# EAGLE board SparkFun_I2S_Audio_Breakout-Panel (EAGLE 9.1.0), part 1 of 6
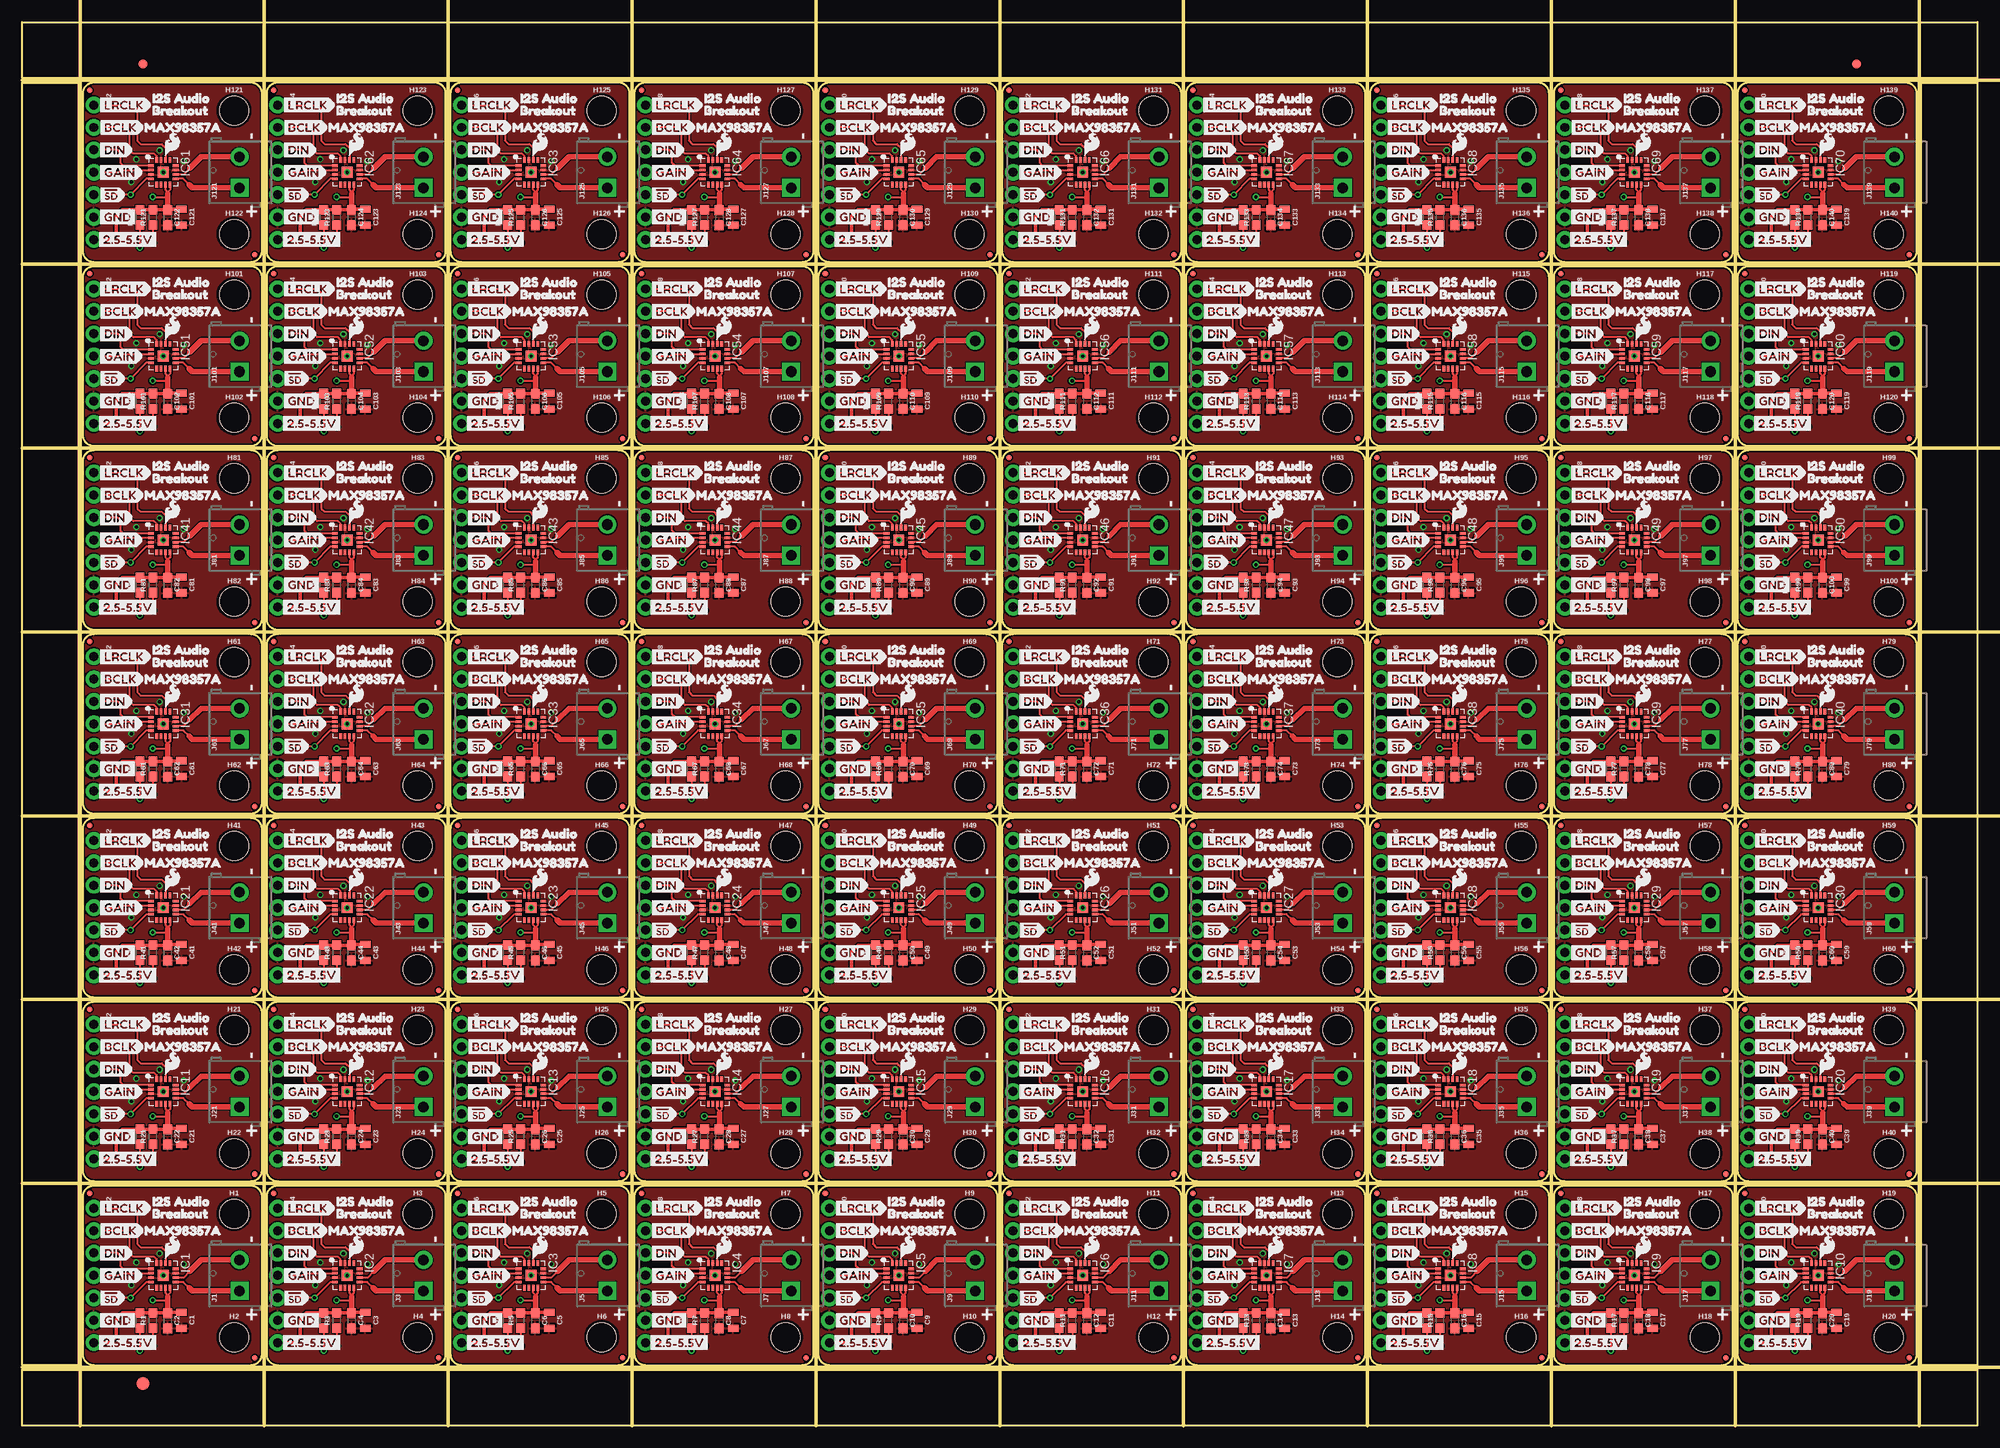
[diagram p0: board, top side]
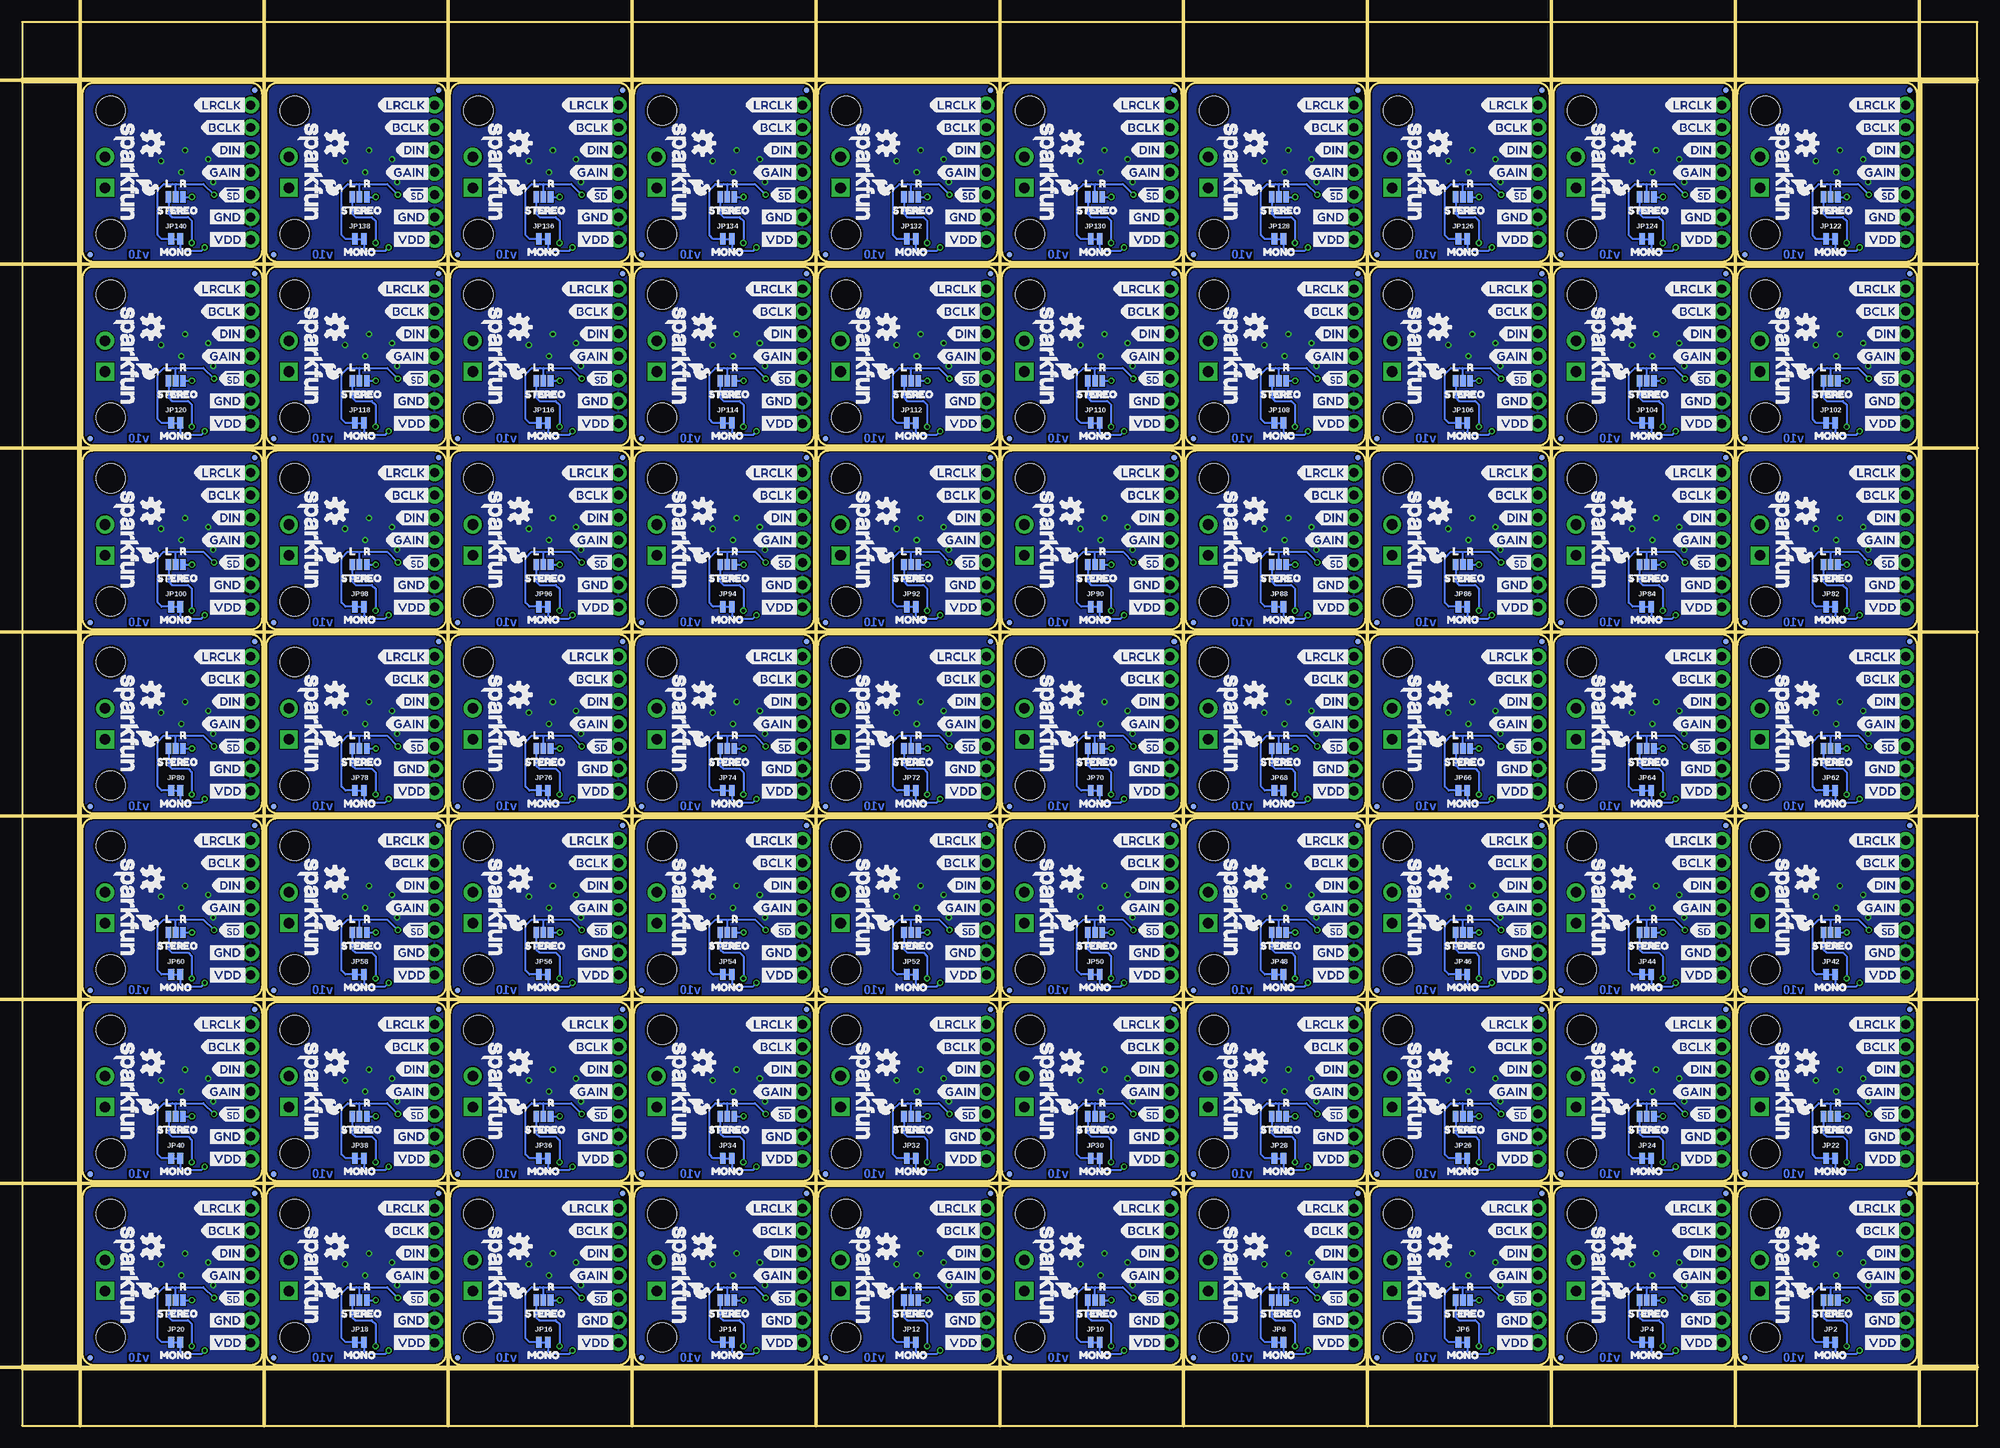
[diagram p1: board, bottom side, seen from below]

Size 221.49 x 159 mm. Coordinates in mm from the lower left corner, seen from the top.
Outline: 576 segments
Copper layers (1*16): Top 0.035mm / dielectric 1.5mm / Bottom 0.035mm
Design rules "SparkFun-2-layer-PCBWay-LIMIT": minimum track width 6mil, minimum drill 0.3mm, track to track 6mil, track to pad 6mil, pad to pad 6mil, via to via 6mil, smd to smd 6mil, copper to edge 6mil, drill to drill 6mil, minimum pad ring 6mil, minimum via ring 6mil, stop-mask expansion 4mil, vias tented up to drill 25mil, thermal gap 10mil
tRestrict: 280 lines
Milling: 19 lines

## Footprints (pad centres in the part's own frame; a part is rotated, then mirrored left to right if it is on the bottom)
0805 = smd 0.8 x 1.2: 1 -0.9,0; 2 0.9,0
0603 = smd 1.1 x 1: 1 -0.85,0; 2 0.85,0
FIDUCIAL-1X2 = smd 1 x 1: 1 0,0
FIDUCIAL-1.5X3 = smd 1.5 x 1.5: 1 0,0
FIDUCIAL-MICRO = smd 0.635 x 0.635: 1 0,0
STAND-OFF = hole 3.302: 0,0
TQFN-16 = smd 0.3 x 0.65: P$1 -0.75,-1.4; P$2 -0.25,-1.4; P$3 0.25,-1.4; P$4 0.75,-1.4; P$9 0.75,1.4; P$10 0.25,1.4; P$11 -0.25,1.4; P$12 -0.75,1.4 | smd 0.65 x 0.3: P$5 1.4,-0.75; P$6 1.4,-0.25; P$7 1.4,0.25; P$8 1.4,0.75; P$13 -1.4,0.75; P$14 -1.4,0.25; P$15 -1.4,-0.25; P$16 -1.4,-0.75 | smd 1.23 x 1.23: P$EP 0,0
SCREWTERMINAL-3.5MM-2-NS = drill 1.2 pad 2.032 square: 1 0,0 | drill 1.2 pad 2.032: 2 3.5,0
1X07_NO_SILK = drill 1.016 pad 1.88: 1 0,0; 2 2.54,0; 3 5.08,0; 4 7.62,0; 5 10.16,0; 6 12.7,0; 7 15.24,0
SMT-JUMPER_3_NO_NO-SILK = smd 0.635 x 1.27: 1 -0.813,0; 2 0,0; 3 0.813,0
SMT-JUMPER_2_NC_TRACE_NO-SILK = smd 0.635 x 1.27: 1 -0.508,0; 2 0.508,0

## Placement (x,y rotation side)
C1  10uF  [0805]  18.06,11.94 270 top
C2  0.1uF  [0603]  16.48,11.89 270 top
C3  10uF  [0805]  38.89,11.94 270 top
C4  0.1uF  [0603]  37.31,11.89 270 top
C5  10uF  [0805]  59.72,11.94 270 top
C6  0.1uF  [0603]  58.14,11.89 270 top
C7  10uF  [0805]  80.54,11.94 270 top
C8  0.1uF  [0603]  78.97,11.89 270 top
C9  10uF  [0805]  101.37,11.94 270 top
C10  0.1uF  [0603]  99.8,11.89 270 top
C11  10uF  [0805]  122.2,11.94 270 top
C12  0.1uF  [0603]  120.62,11.89 270 top
C13  10uF  [0805]  143.03,11.94 270 top
C14  0.1uF  [0603]  141.45,11.89 270 top
C15  10uF  [0805]  163.86,11.94 270 top
C16  0.1uF  [0603]  162.28,11.89 270 top
C17  10uF  [0805]  184.68,11.94 270 top
C18  0.1uF  [0603]  183.11,11.89 270 top
C19  10uF  [0805]  205.51,11.94 270 top
C20  0.1uF  [0603]  203.94,11.89 270 top
C21  10uF  [0805]  18.06,32.77 270 top
C22  0.1uF  [0603]  16.48,32.72 270 top
C23  10uF  [0805]  38.89,32.77 270 top
C24  0.1uF  [0603]  37.31,32.72 270 top
C25  10uF  [0805]  59.72,32.77 270 top
C26  0.1uF  [0603]  58.14,32.72 270 top
C27  10uF  [0805]  80.54,32.77 270 top
C28  0.1uF  [0603]  78.97,32.72 270 top
C29  10uF  [0805]  101.37,32.77 270 top
C30  0.1uF  [0603]  99.8,32.72 270 top
C31  10uF  [0805]  122.2,32.77 270 top
C32  0.1uF  [0603]  120.62,32.72 270 top
C33  10uF  [0805]  143.03,32.77 270 top
C34  0.1uF  [0603]  141.45,32.72 270 top
C35  10uF  [0805]  163.86,32.77 270 top
C36  0.1uF  [0603]  162.28,32.72 270 top
C37  10uF  [0805]  184.68,32.77 270 top
C38  0.1uF  [0603]  183.11,32.72 270 top
C39  10uF  [0805]  205.51,32.77 270 top
C40  0.1uF  [0603]  203.94,32.72 270 top
C41  10uF  [0805]  18.06,53.59 270 top
C42  0.1uF  [0603]  16.48,53.54 270 top
C43  10uF  [0805]  38.89,53.59 270 top
C44  0.1uF  [0603]  37.31,53.54 270 top
C45  10uF  [0805]  59.72,53.59 270 top
C46  0.1uF  [0603]  58.14,53.54 270 top
C47  10uF  [0805]  80.54,53.59 270 top
C48  0.1uF  [0603]  78.97,53.54 270 top
C49  10uF  [0805]  101.37,53.59 270 top
C50  0.1uF  [0603]  99.8,53.54 270 top
C51  10uF  [0805]  122.2,53.59 270 top
C52  0.1uF  [0603]  120.62,53.54 270 top
C53  10uF  [0805]  143.03,53.59 270 top
C54  0.1uF  [0603]  141.45,53.54 270 top
C55  10uF  [0805]  163.86,53.59 270 top
C56  0.1uF  [0603]  162.28,53.54 270 top
C57  10uF  [0805]  184.68,53.59 270 top
C58  0.1uF  [0603]  183.11,53.54 270 top
C59  10uF  [0805]  205.51,53.59 270 top
C60  0.1uF  [0603]  203.94,53.54 270 top
C61  10uF  [0805]  18.06,74.42 270 top
C62  0.1uF  [0603]  16.48,74.37 270 top
C63  10uF  [0805]  38.89,74.42 270 top
C64  0.1uF  [0603]  37.31,74.37 270 top
C65  10uF  [0805]  59.72,74.42 270 top
C66  0.1uF  [0603]  58.14,74.37 270 top
C67  10uF  [0805]  80.54,74.42 270 top
C68  0.1uF  [0603]  78.97,74.37 270 top
C69  10uF  [0805]  101.37,74.42 270 top
C70  0.1uF  [0603]  99.8,74.37 270 top
C71  10uF  [0805]  122.2,74.42 270 top
C72  0.1uF  [0603]  120.62,74.37 270 top
C73  10uF  [0805]  143.03,74.42 270 top
C74  0.1uF  [0603]  141.45,74.37 270 top
C75  10uF  [0805]  163.86,74.42 270 top
C76  0.1uF  [0603]  162.28,74.37 270 top
C77  10uF  [0805]  184.68,74.42 270 top
C78  0.1uF  [0603]  183.11,74.37 270 top
C79  10uF  [0805]  205.51,74.42 270 top
C80  0.1uF  [0603]  203.94,74.37 270 top
C81  10uF  [0805]  18.06,95.25 270 top
C82  0.1uF  [0603]  16.48,95.2 270 top
C83  10uF  [0805]  38.89,95.25 270 top
C84  0.1uF  [0603]  37.31,95.2 270 top
C85  10uF  [0805]  59.72,95.25 270 top
C86  0.1uF  [0603]  58.14,95.2 270 top
C87  10uF  [0805]  80.54,95.25 270 top
C88  0.1uF  [0603]  78.97,95.2 270 top
C89  10uF  [0805]  101.37,95.25 270 top
C90  0.1uF  [0603]  99.8,95.2 270 top
C91  10uF  [0805]  122.2,95.25 270 top
C92  0.1uF  [0603]  120.62,95.2 270 top
C93  10uF  [0805]  143.03,95.25 270 top
C94  0.1uF  [0603]  141.45,95.2 270 top
C95  10uF  [0805]  163.86,95.25 270 top
C96  0.1uF  [0603]  162.28,95.2 270 top
C97  10uF  [0805]  184.68,95.25 270 top
C98  0.1uF  [0603]  183.11,95.2 270 top
C99  10uF  [0805]  205.51,95.25 270 top
C100  0.1uF  [0603]  203.94,95.2 270 top
C101  10uF  [0805]  18.06,116.08 270 top
C102  0.1uF  [0603]  16.48,116.03 270 top
C103  10uF  [0805]  38.89,116.08 270 top
C104  0.1uF  [0603]  37.31,116.03 270 top
C105  10uF  [0805]  59.72,116.08 270 top
C106  0.1uF  [0603]  58.14,116.03 270 top
C107  10uF  [0805]  80.54,116.08 270 top
C108  0.1uF  [0603]  78.97,116.03 270 top
C109  10uF  [0805]  101.37,116.08 270 top
C110  0.1uF  [0603]  99.8,116.03 270 top
C111  10uF  [0805]  122.2,116.08 270 top
C112  0.1uF  [0603]  120.62,116.03 270 top
C113  10uF  [0805]  143.03,116.08 270 top
C114  0.1uF  [0603]  141.45,116.03 270 top
C115  10uF  [0805]  163.86,116.08 270 top
C116  0.1uF  [0603]  162.28,116.03 270 top
C117  10uF  [0805]  184.68,116.08 270 top
C118  0.1uF  [0603]  183.11,116.03 270 top
C119  10uF  [0805]  205.51,116.08 270 top
C120  0.1uF  [0603]  203.94,116.03 270 top
C121  10uF  [0805]  18.06,136.91 270 top
C122  0.1uF  [0603]  16.48,136.86 270 top
C123  10uF  [0805]  38.89,136.91 270 top
C124  0.1uF  [0603]  37.31,136.86 270 top
C125  10uF  [0805]  59.72,136.91 270 top
C126  0.1uF  [0603]  58.14,136.86 270 top
C127  10uF  [0805]  80.54,136.91 270 top
C128  0.1uF  [0603]  78.97,136.86 270 top
C129  10uF  [0805]  101.37,136.91 270 top
C130  0.1uF  [0603]  99.8,136.86 270 top
C131  10uF  [0805]  122.2,136.91 270 top
C132  0.1uF  [0603]  120.62,136.86 270 top
C133  10uF  [0805]  143.03,136.91 270 top
C134  0.1uF  [0603]  141.45,136.86 270 top
C135  10uF  [0805]  163.86,136.91 270 top
C136  0.1uF  [0603]  162.28,136.86 270 top
C137  10uF  [0805]  184.68,136.91 270 top
C138  0.1uF  [0603]  183.11,136.86 270 top
C139  10uF  [0805]  205.51,136.91 270 top
C140  0.1uF  [0603]  203.94,136.86 270 top
E$1  [FIDUCIAL-1X2]  13.72,154.24 0 top
E$2  [FIDUCIAL-1X2]  207.77,154.24 0 top
E$3  [FIDUCIAL-1.5X3]  13.72,4.76 0 top
FD1  FIDUCIALUFIDUCIAL  [FIDUCIAL-MICRO]  26.34,7.67 0 top
FD2  FIDUCIALUFIDUCIAL  [FIDUCIAL-MICRO]  7.67,26.34 0 top
FD3  FIDUCIALUFIDUCIAL  [FIDUCIAL-MICRO]  26.34,7.67 0 bottom
FD4  FIDUCIALUFIDUCIAL  [FIDUCIAL-MICRO]  7.67,26.34 0 bottom
FD5  FIDUCIALUFIDUCIAL  [FIDUCIAL-MICRO]  47.17,7.67 0 top
FD6  FIDUCIALUFIDUCIAL  [FIDUCIAL-MICRO]  28.5,26.34 0 top
FD7  FIDUCIALUFIDUCIAL  [FIDUCIAL-MICRO]  47.17,7.67 0 bottom
FD8  FIDUCIALUFIDUCIAL  [FIDUCIAL-MICRO]  28.5,26.34 0 bottom
FD9  FIDUCIALUFIDUCIAL  [FIDUCIAL-MICRO]  68,7.67 0 top
FD10  FIDUCIALUFIDUCIAL  [FIDUCIAL-MICRO]  49.33,26.34 0 top
FD11  FIDUCIALUFIDUCIAL  [FIDUCIAL-MICRO]  68,7.67 0 bottom
FD12  FIDUCIALUFIDUCIAL  [FIDUCIAL-MICRO]  49.33,26.34 0 bottom
FD13  FIDUCIALUFIDUCIAL  [FIDUCIAL-MICRO]  88.82,7.67 0 top
FD14  FIDUCIALUFIDUCIAL  [FIDUCIAL-MICRO]  70.15,26.34 0 top
FD15  FIDUCIALUFIDUCIAL  [FIDUCIAL-MICRO]  88.82,7.67 0 bottom
FD16  FIDUCIALUFIDUCIAL  [FIDUCIAL-MICRO]  70.15,26.34 0 bottom
FD17  FIDUCIALUFIDUCIAL  [FIDUCIAL-MICRO]  109.65,7.67 0 top
FD18  FIDUCIALUFIDUCIAL  [FIDUCIAL-MICRO]  90.98,26.34 0 top
FD19  FIDUCIALUFIDUCIAL  [FIDUCIAL-MICRO]  109.65,7.67 0 bottom
FD20  FIDUCIALUFIDUCIAL  [FIDUCIAL-MICRO]  90.98,26.34 0 bottom
FD21  FIDUCIALUFIDUCIAL  [FIDUCIAL-MICRO]  130.48,7.67 0 top
FD22  FIDUCIALUFIDUCIAL  [FIDUCIAL-MICRO]  111.81,26.34 0 top
FD23  FIDUCIALUFIDUCIAL  [FIDUCIAL-MICRO]  130.48,7.67 0 bottom
FD24  FIDUCIALUFIDUCIAL  [FIDUCIAL-MICRO]  111.81,26.34 0 bottom
FD25  FIDUCIALUFIDUCIAL  [FIDUCIAL-MICRO]  151.31,7.67 0 top
FD26  FIDUCIALUFIDUCIAL  [FIDUCIAL-MICRO]  132.64,26.34 0 top
FD27  FIDUCIALUFIDUCIAL  [FIDUCIAL-MICRO]  151.31,7.67 0 bottom
FD28  FIDUCIALUFIDUCIAL  [FIDUCIAL-MICRO]  132.64,26.34 0 bottom
FD29  FIDUCIALUFIDUCIAL  [FIDUCIAL-MICRO]  172.14,7.67 0 top
FD30  FIDUCIALUFIDUCIAL  [FIDUCIAL-MICRO]  153.47,26.34 0 top
FD31  FIDUCIALUFIDUCIAL  [FIDUCIAL-MICRO]  172.14,7.67 0 bottom
FD32  FIDUCIALUFIDUCIAL  [FIDUCIAL-MICRO]  153.47,26.34 0 bottom
FD33  FIDUCIALUFIDUCIAL  [FIDUCIAL-MICRO]  192.96,7.67 0 top
FD34  FIDUCIALUFIDUCIAL  [FIDUCIAL-MICRO]  174.29,26.34 0 top
FD35  FIDUCIALUFIDUCIAL  [FIDUCIAL-MICRO]  192.96,7.67 0 bottom
FD36  FIDUCIALUFIDUCIAL  [FIDUCIAL-MICRO]  174.29,26.34 0 bottom
FD37  FIDUCIALUFIDUCIAL  [FIDUCIAL-MICRO]  213.79,7.67 0 top
FD38  FIDUCIALUFIDUCIAL  [FIDUCIAL-MICRO]  195.12,26.34 0 top
FD39  FIDUCIALUFIDUCIAL  [FIDUCIAL-MICRO]  213.79,7.67 0 bottom
FD40  FIDUCIALUFIDUCIAL  [FIDUCIAL-MICRO]  195.12,26.34 0 bottom
FD41  FIDUCIALUFIDUCIAL  [FIDUCIAL-MICRO]  26.34,28.5 0 top
FD42  FIDUCIALUFIDUCIAL  [FIDUCIAL-MICRO]  7.67,47.17 0 top
FD43  FIDUCIALUFIDUCIAL  [FIDUCIAL-MICRO]  26.34,28.5 0 bottom
FD44  FIDUCIALUFIDUCIAL  [FIDUCIAL-MICRO]  7.67,47.17 0 bottom
FD45  FIDUCIALUFIDUCIAL  [FIDUCIAL-MICRO]  47.17,28.5 0 top
FD46  FIDUCIALUFIDUCIAL  [FIDUCIAL-MICRO]  28.5,47.17 0 top
FD47  FIDUCIALUFIDUCIAL  [FIDUCIAL-MICRO]  47.17,28.5 0 bottom
FD48  FIDUCIALUFIDUCIAL  [FIDUCIAL-MICRO]  28.5,47.17 0 bottom
FD49  FIDUCIALUFIDUCIAL  [FIDUCIAL-MICRO]  68,28.5 0 top
FD50  FIDUCIALUFIDUCIAL  [FIDUCIAL-MICRO]  49.33,47.17 0 top
FD51  FIDUCIALUFIDUCIAL  [FIDUCIAL-MICRO]  68,28.5 0 bottom
FD52  FIDUCIALUFIDUCIAL  [FIDUCIAL-MICRO]  49.33,47.17 0 bottom
FD53  FIDUCIALUFIDUCIAL  [FIDUCIAL-MICRO]  88.82,28.5 0 top
FD54  FIDUCIALUFIDUCIAL  [FIDUCIAL-MICRO]  70.15,47.17 0 top
FD55  FIDUCIALUFIDUCIAL  [FIDUCIAL-MICRO]  88.82,28.5 0 bottom
FD56  FIDUCIALUFIDUCIAL  [FIDUCIAL-MICRO]  70.15,47.17 0 bottom
FD57  FIDUCIALUFIDUCIAL  [FIDUCIAL-MICRO]  109.65,28.5 0 top
FD58  FIDUCIALUFIDUCIAL  [FIDUCIAL-MICRO]  90.98,47.17 0 top
FD59  FIDUCIALUFIDUCIAL  [FIDUCIAL-MICRO]  109.65,28.5 0 bottom
FD60  FIDUCIALUFIDUCIAL  [FIDUCIAL-MICRO]  90.98,47.17 0 bottom
FD61  FIDUCIALUFIDUCIAL  [FIDUCIAL-MICRO]  130.48,28.5 0 top
FD62  FIDUCIALUFIDUCIAL  [FIDUCIAL-MICRO]  111.81,47.17 0 top
FD63  FIDUCIALUFIDUCIAL  [FIDUCIAL-MICRO]  130.48,28.5 0 bottom
FD64  FIDUCIALUFIDUCIAL  [FIDUCIAL-MICRO]  111.81,47.17 0 bottom
FD65  FIDUCIALUFIDUCIAL  [FIDUCIAL-MICRO]  151.31,28.5 0 top
FD66  FIDUCIALUFIDUCIAL  [FIDUCIAL-MICRO]  132.64,47.17 0 top
FD67  FIDUCIALUFIDUCIAL  [FIDUCIAL-MICRO]  151.31,28.5 0 bottom
FD68  FIDUCIALUFIDUCIAL  [FIDUCIAL-MICRO]  132.64,47.17 0 bottom
FD69  FIDUCIALUFIDUCIAL  [FIDUCIAL-MICRO]  172.14,28.5 0 top
FD70  FIDUCIALUFIDUCIAL  [FIDUCIAL-MICRO]  153.47,47.17 0 top
FD71  FIDUCIALUFIDUCIAL  [FIDUCIAL-MICRO]  172.14,28.5 0 bottom
FD72  FIDUCIALUFIDUCIAL  [FIDUCIAL-MICRO]  153.47,47.17 0 bottom
FD73  FIDUCIALUFIDUCIAL  [FIDUCIAL-MICRO]  192.96,28.5 0 top
FD74  FIDUCIALUFIDUCIAL  [FIDUCIAL-MICRO]  174.29,47.17 0 top
FD75  FIDUCIALUFIDUCIAL  [FIDUCIAL-MICRO]  192.96,28.5 0 bottom
FD76  FIDUCIALUFIDUCIAL  [FIDUCIAL-MICRO]  174.29,47.17 0 bottom
FD77  FIDUCIALUFIDUCIAL  [FIDUCIAL-MICRO]  213.79,28.5 0 top
FD78  FIDUCIALUFIDUCIAL  [FIDUCIAL-MICRO]  195.12,47.17 0 top
FD79  FIDUCIALUFIDUCIAL  [FIDUCIAL-MICRO]  213.79,28.5 0 bottom
FD80  FIDUCIALUFIDUCIAL  [FIDUCIAL-MICRO]  195.12,47.17 0 bottom
FD81  FIDUCIALUFIDUCIAL  [FIDUCIAL-MICRO]  26.34,49.33 0 top
FD82  FIDUCIALUFIDUCIAL  [FIDUCIAL-MICRO]  7.67,68 0 top
FD83  FIDUCIALUFIDUCIAL  [FIDUCIAL-MICRO]  26.34,49.33 0 bottom
FD84  FIDUCIALUFIDUCIAL  [FIDUCIAL-MICRO]  7.67,68 0 bottom
FD85  FIDUCIALUFIDUCIAL  [FIDUCIAL-MICRO]  47.17,49.33 0 top
FD86  FIDUCIALUFIDUCIAL  [FIDUCIAL-MICRO]  28.5,68 0 top
FD87  FIDUCIALUFIDUCIAL  [FIDUCIAL-MICRO]  47.17,49.33 0 bottom
FD88  FIDUCIALUFIDUCIAL  [FIDUCIAL-MICRO]  28.5,68 0 bottom
FD89  FIDUCIALUFIDUCIAL  [FIDUCIAL-MICRO]  68,49.33 0 top
FD90  FIDUCIALUFIDUCIAL  [FIDUCIAL-MICRO]  49.33,68 0 top
FD91  FIDUCIALUFIDUCIAL  [FIDUCIAL-MICRO]  68,49.33 0 bottom
FD92  FIDUCIALUFIDUCIAL  [FIDUCIAL-MICRO]  49.33,68 0 bottom
FD93  FIDUCIALUFIDUCIAL  [FIDUCIAL-MICRO]  88.82,49.33 0 top
FD94  FIDUCIALUFIDUCIAL  [FIDUCIAL-MICRO]  70.15,68 0 top
FD95  FIDUCIALUFIDUCIAL  [FIDUCIAL-MICRO]  88.82,49.33 0 bottom
FD96  FIDUCIALUFIDUCIAL  [FIDUCIAL-MICRO]  70.15,68 0 bottom
FD97  FIDUCIALUFIDUCIAL  [FIDUCIAL-MICRO]  109.65,49.33 0 top
FD98  FIDUCIALUFIDUCIAL  [FIDUCIAL-MICRO]  90.98,68 0 top
FD99  FIDUCIALUFIDUCIAL  [FIDUCIAL-MICRO]  109.65,49.33 0 bottom
FD100  FIDUCIALUFIDUCIAL  [FIDUCIAL-MICRO]  90.98,68 0 bottom
FD101  FIDUCIALUFIDUCIAL  [FIDUCIAL-MICRO]  130.48,49.33 0 top
FD102  FIDUCIALUFIDUCIAL  [FIDUCIAL-MICRO]  111.81,68 0 top
FD103  FIDUCIALUFIDUCIAL  [FIDUCIAL-MICRO]  130.48,49.33 0 bottom
FD104  FIDUCIALUFIDUCIAL  [FIDUCIAL-MICRO]  111.81,68 0 bottom
FD105  FIDUCIALUFIDUCIAL  [FIDUCIAL-MICRO]  151.31,49.33 0 top
FD106  FIDUCIALUFIDUCIAL  [FIDUCIAL-MICRO]  132.64,68 0 top
FD107  FIDUCIALUFIDUCIAL  [FIDUCIAL-MICRO]  151.31,49.33 0 bottom
FD108  FIDUCIALUFIDUCIAL  [FIDUCIAL-MICRO]  132.64,68 0 bottom
FD109  FIDUCIALUFIDUCIAL  [FIDUCIAL-MICRO]  172.14,49.33 0 top
FD110  FIDUCIALUFIDUCIAL  [FIDUCIAL-MICRO]  153.47,68 0 top
FD111  FIDUCIALUFIDUCIAL  [FIDUCIAL-MICRO]  172.14,49.33 0 bottom
FD112  FIDUCIALUFIDUCIAL  [FIDUCIAL-MICRO]  153.47,68 0 bottom
FD113  FIDUCIALUFIDUCIAL  [FIDUCIAL-MICRO]  192.96,49.33 0 top
FD114  FIDUCIALUFIDUCIAL  [FIDUCIAL-MICRO]  174.29,68 0 top
FD115  FIDUCIALUFIDUCIAL  [FIDUCIAL-MICRO]  192.96,49.33 0 bottom
FD116  FIDUCIALUFIDUCIAL  [FIDUCIAL-MICRO]  174.29,68 0 bottom
FD117  FIDUCIALUFIDUCIAL  [FIDUCIAL-MICRO]  213.79,49.33 0 top
FD118  FIDUCIALUFIDUCIAL  [FIDUCIAL-MICRO]  195.12,68 0 top
FD119  FIDUCIALUFIDUCIAL  [FIDUCIAL-MICRO]  213.79,49.33 0 bottom
FD120  FIDUCIALUFIDUCIAL  [FIDUCIAL-MICRO]  195.12,68 0 bottom
FD121  FIDUCIALUFIDUCIAL  [FIDUCIAL-MICRO]  26.34,70.15 0 top
FD122  FIDUCIALUFIDUCIAL  [FIDUCIAL-MICRO]  7.67,88.82 0 top
FD123  FIDUCIALUFIDUCIAL  [FIDUCIAL-MICRO]  26.34,70.15 0 bottom
FD124  FIDUCIALUFIDUCIAL  [FIDUCIAL-MICRO]  7.67,88.82 0 bottom
FD125  FIDUCIALUFIDUCIAL  [FIDUCIAL-MICRO]  47.17,70.15 0 top
FD126  FIDUCIALUFIDUCIAL  [FIDUCIAL-MICRO]  28.5,88.82 0 top
FD127  FIDUCIALUFIDUCIAL  [FIDUCIAL-MICRO]  47.17,70.15 0 bottom
FD128  FIDUCIALUFIDUCIAL  [FIDUCIAL-MICRO]  28.5,88.82 0 bottom
FD129  FIDUCIALUFIDUCIAL  [FIDUCIAL-MICRO]  68,70.15 0 top
FD130  FIDUCIALUFIDUCIAL  [FIDUCIAL-MICRO]  49.33,88.82 0 top
FD131  FIDUCIALUFIDUCIAL  [FIDUCIAL-MICRO]  68,70.15 0 bottom
FD132  FIDUCIALUFIDUCIAL  [FIDUCIAL-MICRO]  49.33,88.82 0 bottom
FD133  FIDUCIALUFIDUCIAL  [FIDUCIAL-MICRO]  88.82,70.15 0 top
FD134  FIDUCIALUFIDUCIAL  [FIDUCIAL-MICRO]  70.15,88.82 0 top
FD135  FIDUCIALUFIDUCIAL  [FIDUCIAL-MICRO]  88.82,70.15 0 bottom
FD136  FIDUCIALUFIDUCIAL  [FIDUCIAL-MICRO]  70.15,88.82 0 bottom
FD137  FIDUCIALUFIDUCIAL  [FIDUCIAL-MICRO]  109.65,70.15 0 top
FD138  FIDUCIALUFIDUCIAL  [FIDUCIAL-MICRO]  90.98,88.82 0 top
FD139  FIDUCIALUFIDUCIAL  [FIDUCIAL-MICRO]  109.65,70.15 0 bottom
FD140  FIDUCIALUFIDUCIAL  [FIDUCIAL-MICRO]  90.98,88.82 0 bottom
FD141  FIDUCIALUFIDUCIAL  [FIDUCIAL-MICRO]  130.48,70.15 0 top
FD142  FIDUCIALUFIDUCIAL  [FIDUCIAL-MICRO]  111.81,88.82 0 top
FD143  FIDUCIALUFIDUCIAL  [FIDUCIAL-MICRO]  130.48,70.15 0 bottom
FD144  FIDUCIALUFIDUCIAL  [FIDUCIAL-MICRO]  111.81,88.82 0 bottom
FD145  FIDUCIALUFIDUCIAL  [FIDUCIAL-MICRO]  151.31,70.15 0 top
FD146  FIDUCIALUFIDUCIAL  [FIDUCIAL-MICRO]  132.64,88.82 0 top
FD147  FIDUCIALUFIDUCIAL  [FIDUCIAL-MICRO]  151.31,70.15 0 bottom
FD148  FIDUCIALUFIDUCIAL  [FIDUCIAL-MICRO]  132.64,88.82 0 bottom
FD149  FIDUCIALUFIDUCIAL  [FIDUCIAL-MICRO]  172.14,70.15 0 top
FD150  FIDUCIALUFIDUCIAL  [FIDUCIAL-MICRO]  153.47,88.82 0 top
FD151  FIDUCIALUFIDUCIAL  [FIDUCIAL-MICRO]  172.14,70.15 0 bottom
FD152  FIDUCIALUFIDUCIAL  [FIDUCIAL-MICRO]  153.47,88.82 0 bottom
FD153  FIDUCIALUFIDUCIAL  [FIDUCIAL-MICRO]  192.96,70.15 0 top
FD154  FIDUCIALUFIDUCIAL  [FIDUCIAL-MICRO]  174.29,88.82 0 top
FD155  FIDUCIALUFIDUCIAL  [FIDUCIAL-MICRO]  192.96,70.15 0 bottom
FD156  FIDUCIALUFIDUCIAL  [FIDUCIAL-MICRO]  174.29,88.82 0 bottom
FD157  FIDUCIALUFIDUCIAL  [FIDUCIAL-MICRO]  213.79,70.15 0 top
FD158  FIDUCIALUFIDUCIAL  [FIDUCIAL-MICRO]  195.12,88.82 0 top
FD159  FIDUCIALUFIDUCIAL  [FIDUCIAL-MICRO]  213.79,70.15 0 bottom
FD160  FIDUCIALUFIDUCIAL  [FIDUCIAL-MICRO]  195.12,88.82 0 bottom
FD161  FIDUCIALUFIDUCIAL  [FIDUCIAL-MICRO]  26.34,90.98 0 top
FD162  FIDUCIALUFIDUCIAL  [FIDUCIAL-MICRO]  7.67,109.65 0 top
FD163  FIDUCIALUFIDUCIAL  [FIDUCIAL-MICRO]  26.34,90.98 0 bottom
FD164  FIDUCIALUFIDUCIAL  [FIDUCIAL-MICRO]  7.67,109.65 0 bottom
FD165  FIDUCIALUFIDUCIAL  [FIDUCIAL-MICRO]  47.17,90.98 0 top
FD166  FIDUCIALUFIDUCIAL  [FIDUCIAL-MICRO]  28.5,109.65 0 top
FD167  FIDUCIALUFIDUCIAL  [FIDUCIAL-MICRO]  47.17,90.98 0 bottom
FD168  FIDUCIALUFIDUCIAL  [FIDUCIAL-MICRO]  28.5,109.65 0 bottom
FD169  FIDUCIALUFIDUCIAL  [FIDUCIAL-MICRO]  68,90.98 0 top
FD170  FIDUCIALUFIDUCIAL  [FIDUCIAL-MICRO]  49.33,109.65 0 top
FD171  FIDUCIALUFIDUCIAL  [FIDUCIAL-MICRO]  68,90.98 0 bottom
FD172  FIDUCIALUFIDUCIAL  [FIDUCIAL-MICRO]  49.33,109.65 0 bottom
FD173  FIDUCIALUFIDUCIAL  [FIDUCIAL-MICRO]  88.82,90.98 0 top
FD174  FIDUCIALUFIDUCIAL  [FIDUCIAL-MICRO]  70.15,109.65 0 top
FD175  FIDUCIALUFIDUCIAL  [FIDUCIAL-MICRO]  88.82,90.98 0 bottom
FD176  FIDUCIALUFIDUCIAL  [FIDUCIAL-MICRO]  70.15,109.65 0 bottom
FD177  FIDUCIALUFIDUCIAL  [FIDUCIAL-MICRO]  109.65,90.98 0 top
FD178  FIDUCIALUFIDUCIAL  [FIDUCIAL-MICRO]  90.98,109.65 0 top
FD179  FIDUCIALUFIDUCIAL  [FIDUCIAL-MICRO]  109.65,90.98 0 bottom
FD180  FIDUCIALUFIDUCIAL  [FIDUCIAL-MICRO]  90.98,109.65 0 bottom
FD181  FIDUCIALUFIDUCIAL  [FIDUCIAL-MICRO]  130.48,90.98 0 top
FD182  FIDUCIALUFIDUCIAL  [FIDUCIAL-MICRO]  111.81,109.65 0 top
FD183  FIDUCIALUFIDUCIAL  [FIDUCIAL-MICRO]  130.48,90.98 0 bottom
FD184  FIDUCIALUFIDUCIAL  [FIDUCIAL-MICRO]  111.81,109.65 0 bottom
FD185  FIDUCIALUFIDUCIAL  [FIDUCIAL-MICRO]  151.31,90.98 0 top
FD186  FIDUCIALUFIDUCIAL  [FIDUCIAL-MICRO]  132.64,109.65 0 top
FD187  FIDUCIALUFIDUCIAL  [FIDUCIAL-MICRO]  151.31,90.98 0 bottom
FD188  FIDUCIALUFIDUCIAL  [FIDUCIAL-MICRO]  132.64,109.65 0 bottom
FD189  FIDUCIALUFIDUCIAL  [FIDUCIAL-MICRO]  172.14,90.98 0 top
FD190  FIDUCIALUFIDUCIAL  [FIDUCIAL-MICRO]  153.47,109.65 0 top
FD191  FIDUCIALUFIDUCIAL  [FIDUCIAL-MICRO]  172.14,90.98 0 bottom
FD192  FIDUCIALUFIDUCIAL  [FIDUCIAL-MICRO]  153.47,109.65 0 bottom
FD193  FIDUCIALUFIDUCIAL  [FIDUCIAL-MICRO]  192.96,90.98 0 top
FD194  FIDUCIALUFIDUCIAL  [FIDUCIAL-MICRO]  174.29,109.65 0 top
FD195  FIDUCIALUFIDUCIAL  [FIDUCIAL-MICRO]  192.96,90.98 0 bottom
FD196  FIDUCIALUFIDUCIAL  [FIDUCIAL-MICRO]  174.29,109.65 0 bottom
FD197  FIDUCIALUFIDUCIAL  [FIDUCIAL-MICRO]  213.79,90.98 0 top
FD198  FIDUCIALUFIDUCIAL  [FIDUCIAL-MICRO]  195.12,109.65 0 top
FD199  FIDUCIALUFIDUCIAL  [FIDUCIAL-MICRO]  213.79,90.98 0 bottom
FD200  FIDUCIALUFIDUCIAL  [FIDUCIAL-MICRO]  195.12,109.65 0 bottom
FD201  FIDUCIALUFIDUCIAL  [FIDUCIAL-MICRO]  26.34,111.81 0 top
FD202  FIDUCIALUFIDUCIAL  [FIDUCIAL-MICRO]  7.67,130.48 0 top
FD203  FIDUCIALUFIDUCIAL  [FIDUCIAL-MICRO]  26.34,111.81 0 bottom
FD204  FIDUCIALUFIDUCIAL  [FIDUCIAL-MICRO]  7.67,130.48 0 bottom
FD205  FIDUCIALUFIDUCIAL  [FIDUCIAL-MICRO]  47.17,111.81 0 top
FD206  FIDUCIALUFIDUCIAL  [FIDUCIAL-MICRO]  28.5,130.48 0 top
FD207  FIDUCIALUFIDUCIAL  [FIDUCIAL-MICRO]  47.17,111.81 0 bottom
FD208  FIDUCIALUFIDUCIAL  [FIDUCIAL-MICRO]  28.5,130.48 0 bottom
FD209  FIDUCIALUFIDUCIAL  [FIDUCIAL-MICRO]  68,111.81 0 top
FD210  FIDUCIALUFIDUCIAL  [FIDUCIAL-MICRO]  49.33,130.48 0 top
FD211  FIDUCIALUFIDUCIAL  [FIDUCIAL-MICRO]  68,111.81 0 bottom
FD212  FIDUCIALUFIDUCIAL  [FIDUCIAL-MICRO]  49.33,130.48 0 bottom
FD213  FIDUCIALUFIDUCIAL  [FIDUCIAL-MICRO]  88.82,111.81 0 top
FD214  FIDUCIALUFIDUCIAL  [FIDUCIAL-MICRO]  70.15,130.48 0 top
FD215  FIDUCIALUFIDUCIAL  [FIDUCIAL-MICRO]  88.82,111.81 0 bottom
FD216  FIDUCIALUFIDUCIAL  [FIDUCIAL-MICRO]  70.15,130.48 0 bottom
FD217  FIDUCIALUFIDUCIAL  [FIDUCIAL-MICRO]  109.65,111.81 0 top
FD218  FIDUCIALUFIDUCIAL  [FIDUCIAL-MICRO]  90.98,130.48 0 top
FD219  FIDUCIALUFIDUCIAL  [FIDUCIAL-MICRO]  109.65,111.81 0 bottom
FD220  FIDUCIALUFIDUCIAL  [FIDUCIAL-MICRO]  90.98,130.48 0 bottom
FD221  FIDUCIALUFIDUCIAL  [FIDUCIAL-MICRO]  130.48,111.81 0 top
FD222  FIDUCIALUFIDUCIAL  [FIDUCIAL-MICRO]  111.81,130.48 0 top
FD223  FIDUCIALUFIDUCIAL  [FIDUCIAL-MICRO]  130.48,111.81 0 bottom
FD224  FIDUCIALUFIDUCIAL  [FIDUCIAL-MICRO]  111.81,130.48 0 bottom
FD225  FIDUCIALUFIDUCIAL  [FIDUCIAL-MICRO]  151.31,111.81 0 top
FD226  FIDUCIALUFIDUCIAL  [FIDUCIAL-MICRO]  132.64,130.48 0 top
FD227  FIDUCIALUFIDUCIAL  [FIDUCIAL-MICRO]  151.31,111.81 0 bottom
FD228  FIDUCIALUFIDUCIAL  [FIDUCIAL-MICRO]  132.64,130.48 0 bottom
FD229  FIDUCIALUFIDUCIAL  [FIDUCIAL-MICRO]  172.14,111.81 0 top
FD230  FIDUCIALUFIDUCIAL  [FIDUCIAL-MICRO]  153.47,130.48 0 top
FD231  FIDUCIALUFIDUCIAL  [FIDUCIAL-MICRO]  172.14,111.81 0 bottom
FD232  FIDUCIALUFIDUCIAL  [FIDUCIAL-MICRO]  153.47,130.48 0 bottom
FD233  FIDUCIALUFIDUCIAL  [FIDUCIAL-MICRO]  192.96,111.81 0 top
FD234  FIDUCIALUFIDUCIAL  [FIDUCIAL-MICRO]  174.29,130.48 0 top
FD235  FIDUCIALUFIDUCIAL  [FIDUCIAL-MICRO]  192.96,111.81 0 bottom
FD236  FIDUCIALUFIDUCIAL  [FIDUCIAL-MICRO]  174.29,130.48 0 bottom
FD237  FIDUCIALUFIDUCIAL  [FIDUCIAL-MICRO]  213.79,111.81 0 top
FD238  FIDUCIALUFIDUCIAL  [FIDUCIAL-MICRO]  195.12,130.48 0 top
FD239  FIDUCIALUFIDUCIAL  [FIDUCIAL-MICRO]  213.79,111.81 0 bottom
FD240  FIDUCIALUFIDUCIAL  [FIDUCIAL-MICRO]  195.12,130.48 0 bottom
FD241  FIDUCIALUFIDUCIAL  [FIDUCIAL-MICRO]  26.34,132.64 0 top
FD242  FIDUCIALUFIDUCIAL  [FIDUCIAL-MICRO]  7.67,151.31 0 top
FD243  FIDUCIALUFIDUCIAL  [FIDUCIAL-MICRO]  26.34,132.64 0 bottom
FD244  FIDUCIALUFIDUCIAL  [FIDUCIAL-MICRO]  7.67,151.31 0 bottom
FD245  FIDUCIALUFIDUCIAL  [FIDUCIAL-MICRO]  47.17,132.64 0 top
FD246  FIDUCIALUFIDUCIAL  [FIDUCIAL-MICRO]  28.5,151.31 0 top
FD247  FIDUCIALUFIDUCIAL  [FIDUCIAL-MICRO]  47.17,132.64 0 bottom
FD248  FIDUCIALUFIDUCIAL  [FIDUCIAL-MICRO]  28.5,151.31 0 bottom
FD249  FIDUCIALUFIDUCIAL  [FIDUCIAL-MICRO]  68,132.64 0 top
FD250  FIDUCIALUFIDUCIAL  [FIDUCIAL-MICRO]  49.33,151.31 0 top
FD251  FIDUCIALUFIDUCIAL  [FIDUCIAL-MICRO]  68,132.64 0 bottom
FD252  FIDUCIALUFIDUCIAL  [FIDUCIAL-MICRO]  49.33,151.31 0 bottom
FD253  FIDUCIALUFIDUCIAL  [FIDUCIAL-MICRO]  88.82,132.64 0 top
FD254  FIDUCIALUFIDUCIAL  [FIDUCIAL-MICRO]  70.15,151.31 0 top
FD255  FIDUCIALUFIDUCIAL  [FIDUCIAL-MICRO]  88.82,132.64 0 bottom
FD256  FIDUCIALUFIDUCIAL  [FIDUCIAL-MICRO]  70.15,151.31 0 bottom
FD257  FIDUCIALUFIDUCIAL  [FIDUCIAL-MICRO]  109.65,132.64 0 top
FD258  FIDUCIALUFIDUCIAL  [FIDUCIAL-MICRO]  90.98,151.31 0 top
FD259  FIDUCIALUFIDUCIAL  [FIDUCIAL-MICRO]  109.65,132.64 0 bottom
FD260  FIDUCIALUFIDUCIAL  [FIDUCIAL-MICRO]  90.98,151.31 0 bottom
FD261  FIDUCIALUFIDUCIAL  [FIDUCIAL-MICRO]  130.48,132.64 0 top
FD262  FIDUCIALUFIDUCIAL  [FIDUCIAL-MICRO]  111.81,151.31 0 top
FD263  FIDUCIALUFIDUCIAL  [FIDUCIAL-MICRO]  130.48,132.64 0 bottom
FD264  FIDUCIALUFIDUCIAL  [FIDUCIAL-MICRO]  111.81,151.31 0 bottom
FD265  FIDUCIALUFIDUCIAL  [FIDUCIAL-MICRO]  151.31,132.64 0 top
FD266  FIDUCIALUFIDUCIAL  [FIDUCIAL-MICRO]  132.64,151.31 0 top
FD267  FIDUCIALUFIDUCIAL  [FIDUCIAL-MICRO]  151.31,132.64 0 bottom
FD268  FIDUCIALUFIDUCIAL  [FIDUCIAL-MICRO]  132.64,151.31 0 bottom
FD269  FIDUCIALUFIDUCIAL  [FIDUCIAL-MICRO]  172.14,132.64 0 top
FD270  FIDUCIALUFIDUCIAL  [FIDUCIAL-MICRO]  153.47,151.31 0 top
FD271  FIDUCIALUFIDUCIAL  [FIDUCIAL-MICRO]  172.14,132.64 0 bottom
FD272  FIDUCIALUFIDUCIAL  [FIDUCIAL-MICRO]  153.47,151.31 0 bottom
FD273  FIDUCIALUFIDUCIAL  [FIDUCIAL-MICRO]  192.96,132.64 0 top
FD274  FIDUCIALUFIDUCIAL  [FIDUCIAL-MICRO]  174.29,151.31 0 top
FD275  FIDUCIALUFIDUCIAL  [FIDUCIAL-MICRO]  192.96,132.64 0 bottom
FD276  FIDUCIALUFIDUCIAL  [FIDUCIAL-MICRO]  174.29,151.31 0 bottom
FD277  FIDUCIALUFIDUCIAL  [FIDUCIAL-MICRO]  213.79,132.64 0 top
FD278  FIDUCIALUFIDUCIAL  [FIDUCIAL-MICRO]  195.12,151.31 0 top
FD279  FIDUCIALUFIDUCIAL  [FIDUCIAL-MICRO]  213.79,132.64 0 bottom
FD280  FIDUCIALUFIDUCIAL  [FIDUCIAL-MICRO]  195.12,151.31 0 bottom
H1  STAND-OFF  [STAND-OFF]  24,24 0 top
H2  STAND-OFF  [STAND-OFF]  24,10.03 0 top
H3  STAND-OFF  [STAND-OFF]  44.83,24 0 top
H4  STAND-OFF  [STAND-OFF]  44.83,10.03 0 top
H5  STAND-OFF  [STAND-OFF]  65.66,24 0 top
H6  STAND-OFF  [STAND-OFF]  65.66,10.03 0 top
H7  STAND-OFF  [STAND-OFF]  86.49,24 0 top
H8  STAND-OFF  [STAND-OFF]  86.49,10.03 0 top
H9  STAND-OFF  [STAND-OFF]  107.31,24 0 top
H10  STAND-OFF  [STAND-OFF]  107.31,10.03 0 top
H11  STAND-OFF  [STAND-OFF]  128.14,24 0 top
H12  STAND-OFF  [STAND-OFF]  128.14,10.03 0 top
H13  STAND-OFF  [STAND-OFF]  148.97,24 0 top
H14  STAND-OFF  [STAND-OFF]  148.97,10.03 0 top
H15  STAND-OFF  [STAND-OFF]  169.8,24 0 top
H16  STAND-OFF  [STAND-OFF]  169.8,10.03 0 top
H17  STAND-OFF  [STAND-OFF]  190.63,24 0 top
H18  STAND-OFF  [STAND-OFF]  190.63,10.03 0 top
H19  STAND-OFF  [STAND-OFF]  211.46,24 0 top
H20  STAND-OFF  [STAND-OFF]  211.46,10.03 0 top
H21  STAND-OFF  [STAND-OFF]  24,44.83 0 top
H22  STAND-OFF  [STAND-OFF]  24,30.86 0 top
H23  STAND-OFF  [STAND-OFF]  44.83,44.83 0 top
H24  STAND-OFF  [STAND-OFF]  44.83,30.86 0 top
H25  STAND-OFF  [STAND-OFF]  65.66,44.83 0 top
H26  STAND-OFF  [STAND-OFF]  65.66,30.86 0 top
H27  STAND-OFF  [STAND-OFF]  86.49,44.83 0 top
H28  STAND-OFF  [STAND-OFF]  86.49,30.86 0 top
H29  STAND-OFF  [STAND-OFF]  107.31,44.83 0 top
H30  STAND-OFF  [STAND-OFF]  107.31,30.86 0 top
H31  STAND-OFF  [STAND-OFF]  128.14,44.83 0 top
H32  STAND-OFF  [STAND-OFF]  128.14,30.86 0 top
H33  STAND-OFF  [STAND-OFF]  148.97,44.83 0 top
H34  STAND-OFF  [STAND-OFF]  148.97,30.86 0 top
H35  STAND-OFF  [STAND-OFF]  169.8,44.83 0 top
H36  STAND-OFF  [STAND-OFF]  169.8,30.86 0 top
H37  STAND-OFF  [STAND-OFF]  190.63,44.83 0 top
H38  STAND-OFF  [STAND-OFF]  190.63,30.86 0 top
H39  STAND-OFF  [STAND-OFF]  211.46,44.83 0 top
H40  STAND-OFF  [STAND-OFF]  211.46,30.86 0 top
H41  STAND-OFF  [STAND-OFF]  24,65.66 0 top
H42  STAND-OFF  [STAND-OFF]  24,51.69 0 top
H43  STAND-OFF  [STAND-OFF]  44.83,65.66 0 top
H44  STAND-OFF  [STAND-OFF]  44.83,51.69 0 top
H45  STAND-OFF  [STAND-OFF]  65.66,65.66 0 top
H46  STAND-OFF  [STAND-OFF]  65.66,51.69 0 top
H47  STAND-OFF  [STAND-OFF]  86.49,65.66 0 top
H48  STAND-OFF  [STAND-OFF]  86.49,51.69 0 top
H49  STAND-OFF  [STAND-OFF]  107.31,65.66 0 top
H50  STAND-OFF  [STAND-OFF]  107.31,51.69 0 top
H51  STAND-OFF  [STAND-OFF]  128.14,65.66 0 top
H52  STAND-OFF  [STAND-OFF]  128.14,51.69 0 top
H53  STAND-OFF  [STAND-OFF]  148.97,65.66 0 top
H54  STAND-OFF  [STAND-OFF]  148.97,51.69 0 top
H55  STAND-OFF  [STAND-OFF]  169.8,65.66 0 top
H56  STAND-OFF  [STAND-OFF]  169.8,51.69 0 top
H57  STAND-OFF  [STAND-OFF]  190.63,65.66 0 top
H58  STAND-OFF  [STAND-OFF]  190.63,51.69 0 top
H59  STAND-OFF  [STAND-OFF]  211.46,65.66 0 top
H60  STAND-OFF  [STAND-OFF]  211.46,51.69 0 top
H61  STAND-OFF  [STAND-OFF]  24,86.49 0 top
H62  STAND-OFF  [STAND-OFF]  24,72.52 0 top
H63  STAND-OFF  [STAND-OFF]  44.83,86.49 0 top
H64  STAND-OFF  [STAND-OFF]  44.83,72.52 0 top
H65  STAND-OFF  [STAND-OFF]  65.66,86.49 0 top
H66  STAND-OFF  [STAND-OFF]  65.66,72.52 0 top
H67  STAND-OFF  [STAND-OFF]  86.49,86.49 0 top
H68  STAND-OFF  [STAND-OFF]  86.49,72.52 0 top
H69  STAND-OFF  [STAND-OFF]  107.31,86.49 0 top
H70  STAND-OFF  [STAND-OFF]  107.31,72.52 0 top
H71  STAND-OFF  [STAND-OFF]  128.14,86.49 0 top
H72  STAND-OFF  [STAND-OFF]  128.14,72.52 0 top
H73  STAND-OFF  [STAND-OFF]  148.97,86.49 0 top
H74  STAND-OFF  [STAND-OFF]  148.97,72.52 0 top
H75  STAND-OFF  [STAND-OFF]  169.8,86.49 0 top
H76  STAND-OFF  [STAND-OFF]  169.8,72.52 0 top
H77  STAND-OFF  [STAND-OFF]  190.63,86.49 0 top
H78  STAND-OFF  [STAND-OFF]  190.63,72.52 0 top
H79  STAND-OFF  [STAND-OFF]  211.46,86.49 0 top
H80  STAND-OFF  [STAND-OFF]  211.46,72.52 0 top
H81  STAND-OFF  [STAND-OFF]  24,107.31 0 top
H82  STAND-OFF  [STAND-OFF]  24,93.34 0 top
H83  STAND-OFF  [STAND-OFF]  44.83,107.31 0 top
H84  STAND-OFF  [STAND-OFF]  44.83,93.34 0 top
H85  STAND-OFF  [STAND-OFF]  65.66,107.31 0 top
H86  STAND-OFF  [STAND-OFF]  65.66,93.34 0 top
H87  STAND-OFF  [STAND-OFF]  86.49,107.31 0 top
H88  STAND-OFF  [STAND-OFF]  86.49,93.34 0 top
H89  STAND-OFF  [STAND-OFF]  107.31,107.31 0 top
H90  STAND-OFF  [STAND-OFF]  107.31,93.34 0 top
H91  STAND-OFF  [STAND-OFF]  128.14,107.31 0 top
H92  STAND-OFF  [STAND-OFF]  128.14,93.34 0 top
H93  STAND-OFF  [STAND-OFF]  148.97,107.31 0 top
H94  STAND-OFF  [STAND-OFF]  148.97,93.34 0 top
H95  STAND-OFF  [STAND-OFF]  169.8,107.31 0 top
H96  STAND-OFF  [STAND-OFF]  169.8,93.34 0 top
H97  STAND-OFF  [STAND-OFF]  190.63,107.31 0 top
H98  STAND-OFF  [STAND-OFF]  190.63,93.34 0 top
H99  STAND-OFF  [STAND-OFF]  211.46,107.31 0 top
H100  STAND-OFF  [STAND-OFF]  211.46,93.34 0 top
H101  STAND-OFF  [STAND-OFF]  24,128.14 0 top
H102  STAND-OFF  [STAND-OFF]  24,114.17 0 top
H103  STAND-OFF  [STAND-OFF]  44.83,128.14 0 top
H104  STAND-OFF  [STAND-OFF]  44.83,114.17 0 top
H105  STAND-OFF  [STAND-OFF]  65.66,128.14 0 top
H106  STAND-OFF  [STAND-OFF]  65.66,114.17 0 top
H107  STAND-OFF  [STAND-OFF]  86.49,128.14 0 top
H108  STAND-OFF  [STAND-OFF]  86.49,114.17 0 top
H109  STAND-OFF  [STAND-OFF]  107.31,128.14 0 top
H110  STAND-OFF  [STAND-OFF]  107.31,114.17 0 top
H111  STAND-OFF  [STAND-OFF]  128.14,128.14 0 top
H112  STAND-OFF  [STAND-OFF]  128.14,114.17 0 top
H113  STAND-OFF  [STAND-OFF]  148.97,128.14 0 top
H114  STAND-OFF  [STAND-OFF]  148.97,114.17 0 top
H115  STAND-OFF  [STAND-OFF]  169.8,128.14 0 top
H116  STAND-OFF  [STAND-OFF]  169.8,114.17 0 top
H117  STAND-OFF  [STAND-OFF]  190.63,128.14 0 top
H118  STAND-OFF  [STAND-OFF]  190.63,114.17 0 top
H119  STAND-OFF  [STAND-OFF]  211.46,128.14 0 top
H120  STAND-OFF  [STAND-OFF]  211.46,114.17 0 top
H121  STAND-OFF  [STAND-OFF]  24,148.97 0 top
H122  STAND-OFF  [STAND-OFF]  24,135 0 top
H123  STAND-OFF  [STAND-OFF]  44.83,148.97 0 top
H124  STAND-OFF  [STAND-OFF]  44.83,135 0 top
H125  STAND-OFF  [STAND-OFF]  65.66,148.97 0 top
H126  STAND-OFF  [STAND-OFF]  65.66,135 0 top
H127  STAND-OFF  [STAND-OFF]  86.49,148.97 0 top
H128  STAND-OFF  [STAND-OFF]  86.49,135 0 top
H129  STAND-OFF  [STAND-OFF]  107.31,148.97 0 top
H130  STAND-OFF  [STAND-OFF]  107.31,135 0 top
H131  STAND-OFF  [STAND-OFF]  128.14,148.97 0 top
H132  STAND-OFF  [STAND-OFF]  128.14,135 0 top
H133  STAND-OFF  [STAND-OFF]  148.97,148.97 0 top
H134  STAND-OFF  [STAND-OFF]  148.97,135 0 top
H135  STAND-OFF  [STAND-OFF]  169.8,148.97 0 top
H136  STAND-OFF  [STAND-OFF]  169.8,135 0 top
H137  STAND-OFF  [STAND-OFF]  190.63,148.97 0 top
H138  STAND-OFF  [STAND-OFF]  190.63,135 0 top
H139  STAND-OFF  [STAND-OFF]  211.46,148.97 0 top
H140  STAND-OFF  [STAND-OFF]  211.46,135 0 top
IC1  MAX98375A  [TQFN-16]  16,17.02 270 top
IC2  MAX98375A  [TQFN-16]  36.83,17.02 270 top
IC3  MAX98375A  [TQFN-16]  57.66,17.02 270 top
IC4  MAX98375A  [TQFN-16]  78.49,17.02 270 top
IC5  MAX98375A  [TQFN-16]  99.31,17.02 270 top
IC6  MAX98375A  [TQFN-16]  120.14,17.02 270 top
IC7  MAX98375A  [TQFN-16]  140.97,17.02 270 top
IC8  MAX98375A  [TQFN-16]  161.8,17.02 270 top
IC9  MAX98375A  [TQFN-16]  182.63,17.02 270 top
IC10  MAX98375A  [TQFN-16]  203.45,17.02 270 top
IC11  MAX98375A  [TQFN-16]  16,37.85 270 top
IC12  MAX98375A  [TQFN-16]  36.83,37.85 270 top
IC13  MAX98375A  [TQFN-16]  57.66,37.85 270 top
IC14  MAX98375A  [TQFN-16]  78.49,37.85 270 top
IC15  MAX98375A  [TQFN-16]  99.31,37.85 270 top
IC16  MAX98375A  [TQFN-16]  120.14,37.85 270 top
IC17  MAX98375A  [TQFN-16]  140.97,37.85 270 top
IC18  MAX98375A  [TQFN-16]  161.8,37.85 270 top
IC19  MAX98375A  [TQFN-16]  182.63,37.85 270 top
IC20  MAX98375A  [TQFN-16]  203.45,37.85 270 top
IC21  MAX98375A  [TQFN-16]  16,58.67 270 top
IC22  MAX98375A  [TQFN-16]  36.83,58.67 270 top
IC23  MAX98375A  [TQFN-16]  57.66,58.67 270 top
IC24  MAX98375A  [TQFN-16]  78.49,58.67 270 top
IC25  MAX98375A  [TQFN-16]  99.31,58.67 270 top
IC26  MAX98375A  [TQFN-16]  120.14,58.67 270 top
IC27  MAX98375A  [TQFN-16]  140.97,58.67 270 top
IC28  MAX98375A  [TQFN-16]  161.8,58.67 270 top
IC29  MAX98375A  [TQFN-16]  182.63,58.67 270 top
IC30  MAX98375A  [TQFN-16]  203.45,58.67 270 top
IC31  MAX98375A  [TQFN-16]  16,79.5 270 top
IC32  MAX98375A  [TQFN-16]  36.83,79.5 270 top
IC33  MAX98375A  [TQFN-16]  57.66,79.5 270 top
IC34  MAX98375A  [TQFN-16]  78.49,79.5 270 top
IC35  MAX98375A  [TQFN-16]  99.31,79.5 270 top
IC36  MAX98375A  [TQFN-16]  120.14,79.5 270 top
IC37  MAX98375A  [TQFN-16]  140.97,79.5 270 top
IC38  MAX98375A  [TQFN-16]  161.8,79.5 270 top
IC39  MAX98375A  [TQFN-16]  182.63,79.5 270 top
IC40  MAX98375A  [TQFN-16]  203.45,79.5 270 top
IC41  MAX98375A  [TQFN-16]  16,100.33 270 top
IC42  MAX98375A  [TQFN-16]  36.83,100.33 270 top
IC43  MAX98375A  [TQFN-16]  57.66,100.33 270 top
IC44  MAX98375A  [TQFN-16]  78.49,100.33 270 top
IC45  MAX98375A  [TQFN-16]  99.31,100.33 270 top
IC46  MAX98375A  [TQFN-16]  120.14,100.33 270 top
IC47  MAX98375A  [TQFN-16]  140.97,100.33 270 top
IC48  MAX98375A  [TQFN-16]  161.8,100.33 270 top
IC49  MAX98375A  [TQFN-16]  182.63,100.33 270 top
IC50  MAX98375A  [TQFN-16]  203.45,100.33 270 top
IC51  MAX98375A  [TQFN-16]  16,121.16 270 top
IC52  MAX98375A  [TQFN-16]  36.83,121.16 270 top
IC53  MAX98375A  [TQFN-16]  57.66,121.16 270 top
IC54  MAX98375A  [TQFN-16]  78.49,121.16 270 top
IC55  MAX98375A  [TQFN-16]  99.31,121.16 270 top
IC56  MAX98375A  [TQFN-16]  120.14,121.16 270 top
IC57  MAX98375A  [TQFN-16]  140.97,121.16 270 top
IC58  MAX98375A  [TQFN-16]  161.8,121.16 270 top
IC59  MAX98375A  [TQFN-16]  182.63,121.16 270 top
IC60  MAX98375A  [TQFN-16]  203.45,121.16 270 top
IC61  MAX98375A  [TQFN-16]  16,141.99 270 top
IC62  MAX98375A  [TQFN-16]  36.83,141.99 270 top
IC63  MAX98375A  [TQFN-16]  57.66,141.99 270 top
IC64  MAX98375A  [TQFN-16]  78.49,141.99 270 top
IC65  MAX98375A  [TQFN-16]  99.31,141.99 270 top
IC66  MAX98375A  [TQFN-16]  120.14,141.99 270 top
IC67  MAX98375A  [TQFN-16]  140.97,141.99 270 top
IC68  MAX98375A  [TQFN-16]  161.8,141.99 270 top
IC69  MAX98375A  [TQFN-16]  182.63,141.99 270 top
IC70  MAX98375A  [TQFN-16]  203.45,141.99 270 top
J1  [SCREWTERMINAL-3.5MM-2-NS]  24.64,15.27 90 top
J2  [1X07_NO_SILK]  8.13,24.64 270 top
J3  [SCREWTERMINAL-3.5MM-2-NS]  45.47,15.27 90 top
J4  [1X07_NO_SILK]  28.96,24.64 270 top
J5  [SCREWTERMINAL-3.5MM-2-NS]  66.29,15.27 90 top
J6  [1X07_NO_SILK]  49.78,24.64 270 top
J7  [SCREWTERMINAL-3.5MM-2-NS]  87.12,15.27 90 top
J8  [1X07_NO_SILK]  70.61,24.64 270 top
J9  [SCREWTERMINAL-3.5MM-2-NS]  107.95,15.27 90 top
J10  [1X07_NO_SILK]  91.44,24.64 270 top
J11  [SCREWTERMINAL-3.5MM-2-NS]  128.78,15.27 90 top
J12  [1X07_NO_SILK]  112.27,24.64 270 top
J13  [SCREWTERMINAL-3.5MM-2-NS]  149.61,15.27 90 top
J14  [1X07_NO_SILK]  133.1,24.64 270 top
J15  [SCREWTERMINAL-3.5MM-2-NS]  170.43,15.27 90 top
J16  [1X07_NO_SILK]  153.92,24.64 270 top
J17  [SCREWTERMINAL-3.5MM-2-NS]  191.26,15.27 90 top
J18  [1X07_NO_SILK]  174.75,24.64 270 top
J19  [SCREWTERMINAL-3.5MM-2-NS]  212.09,15.27 90 top
J20  [1X07_NO_SILK]  195.58,24.64 270 top
J21  [SCREWTERMINAL-3.5MM-2-NS]  24.64,36.1 90 top
J22  [1X07_NO_SILK]  8.13,45.47 270 top
J23  [SCREWTERMINAL-3.5MM-2-NS]  45.47,36.1 90 top
J24  [1X07_NO_SILK]  28.96,45.47 270 top
J25  [SCREWTERMINAL-3.5MM-2-NS]  66.29,36.1 90 top
J26  [1X07_NO_SILK]  49.78,45.47 270 top
J27  [SCREWTERMINAL-3.5MM-2-NS]  87.12,36.1 90 top
J28  [1X07_NO_SILK]  70.61,45.47 270 top
J29  [SCREWTERMINAL-3.5MM-2-NS]  107.95,36.1 90 top
J30  [1X07_NO_SILK]  91.44,45.47 270 top
J31  [SCREWTERMINAL-3.5MM-2-NS]  128.78,36.1 90 top
J32  [1X07_NO_SILK]  112.27,45.47 270 top
J33  [SCREWTERMINAL-3.5MM-2-NS]  149.61,36.1 90 top
J34  [1X07_NO_SILK]  133.1,45.47 270 top
J35  [SCREWTERMINAL-3.5MM-2-NS]  170.43,36.1 90 top
J36  [1X07_NO_SILK]  153.92,45.47 270 top
J37  [SCREWTERMINAL-3.5MM-2-NS]  191.26,36.1 90 top
J38  [1X07_NO_SILK]  174.75,45.47 270 top
J39  [SCREWTERMINAL-3.5MM-2-NS]  212.09,36.1 90 top
J40  [1X07_NO_SILK]  195.58,45.47 270 top
J41  [SCREWTERMINAL-3.5MM-2-NS]  24.64,56.92 90 top
J42  [1X07_NO_SILK]  8.13,66.29 270 top
J43  [SCREWTERMINAL-3.5MM-2-NS]  45.47,56.92 90 top
J44  [1X07_NO_SILK]  28.96,66.29 270 top
J45  [SCREWTERMINAL-3.5MM-2-NS]  66.29,56.92 90 top
J46  [1X07_NO_SILK]  49.78,66.29 270 top
J47  [SCREWTERMINAL-3.5MM-2-NS]  87.12,56.92 90 top
J48  [1X07_NO_SILK]  70.61,66.29 270 top
J49  [SCREWTERMINAL-3.5MM-2-NS]  107.95,56.92 90 top
J50  [1X07_NO_SILK]  91.44,66.29 270 top
J51  [SCREWTERMINAL-3.5MM-2-NS]  128.78,56.92 90 top
J52  [1X07_NO_SILK]  112.27,66.29 270 top
J53  [SCREWTERMINAL-3.5MM-2-NS]  149.61,56.92 90 top
J54  [1X07_NO_SILK]  133.1,66.29 270 top
J55  [SCREWTERMINAL-3.5MM-2-NS]  170.43,56.92 90 top
J56  [1X07_NO_SILK]  153.92,66.29 270 top
J57  [SCREWTERMINAL-3.5MM-2-NS]  191.26,56.92 90 top
J58  [1X07_NO_SILK]  174.75,66.29 270 top
J59  [SCREWTERMINAL-3.5MM-2-NS]  212.09,56.92 90 top
J60  [1X07_NO_SILK]  195.58,66.29 270 top
J61  [SCREWTERMINAL-3.5MM-2-NS]  24.64,77.75 90 top
J62  [1X07_NO_SILK]  8.13,87.12 270 top
J63  [SCREWTERMINAL-3.5MM-2-NS]  45.47,77.75 90 top
J64  [1X07_NO_SILK]  28.96,87.12 270 top
J65  [SCREWTERMINAL-3.5MM-2-NS]  66.29,77.75 90 top
J66  [1X07_NO_SILK]  49.78,87.12 270 top
J67  [SCREWTERMINAL-3.5MM-2-NS]  87.12,77.75 90 top
J68  [1X07_NO_SILK]  70.61,87.12 270 top
J69  [SCREWTERMINAL-3.5MM-2-NS]  107.95,77.75 90 top
J70  [1X07_NO_SILK]  91.44,87.12 270 top
J71  [SCREWTERMINAL-3.5MM-2-NS]  128.78,77.75 90 top
J72  [1X07_NO_SILK]  112.27,87.12 270 top
J73  [SCREWTERMINAL-3.5MM-2-NS]  149.61,77.75 90 top
J74  [1X07_NO_SILK]  133.1,87.12 270 top
J75  [SCREWTERMINAL-3.5MM-2-NS]  170.43,77.75 90 top
J76  [1X07_NO_SILK]  153.92,87.12 270 top
J77  [SCREWTERMINAL-3.5MM-2-NS]  191.26,77.75 90 top
J78  [1X07_NO_SILK]  174.75,87.12 270 top
J79  [SCREWTERMINAL-3.5MM-2-NS]  212.09,77.75 90 top
J80  [1X07_NO_SILK]  195.58,87.12 270 top
J81  [SCREWTERMINAL-3.5MM-2-NS]  24.64,98.58 90 top
J82  [1X07_NO_SILK]  8.13,107.95 270 top
J83  [SCREWTERMINAL-3.5MM-2-NS]  45.47,98.58 90 top
J84  [1X07_NO_SILK]  28.96,107.95 270 top
J85  [SCREWTERMINAL-3.5MM-2-NS]  66.29,98.58 90 top
J86  [1X07_NO_SILK]  49.78,107.95 270 top
J87  [SCREWTERMINAL-3.5MM-2-NS]  87.12,98.58 90 top
J88  [1X07_NO_SILK]  70.61,107.95 270 top
J89  [SCREWTERMINAL-3.5MM-2-NS]  107.95,98.58 90 top
J90  [1X07_NO_SILK]  91.44,107.95 270 top
J91  [SCREWTERMINAL-3.5MM-2-NS]  128.78,98.58 90 top
J92  [1X07_NO_SILK]  112.27,107.95 270 top
J93  [SCREWTERMINAL-3.5MM-2-NS]  149.61,98.58 90 top
J94  [1X07_NO_SILK]  133.1,107.95 270 top
J95  [SCREWTERMINAL-3.5MM-2-NS]  170.43,98.58 90 top
J96  [1X07_NO_SILK]  153.92,107.95 270 top
J97  [SCREWTERMINAL-3.5MM-2-NS]  191.26,98.58 90 top
J98  [1X07_NO_SILK]  174.75,107.95 270 top
J99  [SCREWTERMINAL-3.5MM-2-NS]  212.09,98.58 90 top
J100  [1X07_NO_SILK]  195.58,107.95 270 top
J101  [SCREWTERMINAL-3.5MM-2-NS]  24.64,119.41 90 top
J102  [1X07_NO_SILK]  8.13,128.78 270 top
J103  [SCREWTERMINAL-3.5MM-2-NS]  45.47,119.41 90 top
J104  [1X07_NO_SILK]  28.96,128.78 270 top
J105  [SCREWTERMINAL-3.5MM-2-NS]  66.29,119.41 90 top
J106  [1X07_NO_SILK]  49.78,128.78 270 top
J107  [SCREWTERMINAL-3.5MM-2-NS]  87.12,119.41 90 top
J108  [1X07_NO_SILK]  70.61,128.78 270 top
J109  [SCREWTERMINAL-3.5MM-2-NS]  107.95,119.41 90 top
J110  [1X07_NO_SILK]  91.44,128.78 270 top
J111  [SCREWTERMINAL-3.5MM-2-NS]  128.78,119.41 90 top
J112  [1X07_NO_SILK]  112.27,128.78 270 top
J113  [SCREWTERMINAL-3.5MM-2-NS]  149.61,119.41 90 top
J114  [1X07_NO_SILK]  133.1,128.78 270 top
J115  [SCREWTERMINAL-3.5MM-2-NS]  170.43,119.41 90 top
J116  [1X07_NO_SILK]  153.92,128.78 270 top
J117  [SCREWTERMINAL-3.5MM-2-NS]  191.26,119.41 90 top
J118  [1X07_NO_SILK]  174.75,128.78 270 top
J119  [SCREWTERMINAL-3.5MM-2-NS]  212.09,119.41 90 top
J120  [1X07_NO_SILK]  195.58,128.78 270 top
J121  [SCREWTERMINAL-3.5MM-2-NS]  24.64,140.24 90 top
J122  [1X07_NO_SILK]  8.13,149.61 270 top
J123  [SCREWTERMINAL-3.5MM-2-NS]  45.47,140.24 90 top
J124  [1X07_NO_SILK]  28.96,149.61 270 top
J125  [SCREWTERMINAL-3.5MM-2-NS]  66.29,140.24 90 top
J126  [1X07_NO_SILK]  49.78,149.61 270 top
J127  [SCREWTERMINAL-3.5MM-2-NS]  87.12,140.24 90 top
J128  [1X07_NO_SILK]  70.61,149.61 270 top
J129  [SCREWTERMINAL-3.5MM-2-NS]  107.95,140.24 90 top
J130  [1X07_NO_SILK]  91.44,149.61 270 top
J131  [SCREWTERMINAL-3.5MM-2-NS]  128.78,140.24 90 top
J132  [1X07_NO_SILK]  112.27,149.61 270 top
J133  [SCREWTERMINAL-3.5MM-2-NS]  149.61,140.24 90 top
J134  [1X07_NO_SILK]  133.1,149.61 270 top
J135  [SCREWTERMINAL-3.5MM-2-NS]  170.43,140.24 90 top
J136  [1X07_NO_SILK]  153.92,149.61 270 top
J137  [SCREWTERMINAL-3.5MM-2-NS]  191.26,140.24 90 top
J138  [1X07_NO_SILK]  174.75,149.61 270 top
J139  [SCREWTERMINAL-3.5MM-2-NS]  212.09,140.24 90 top
J140  [1X07_NO_SILK]  195.58,149.61 270 top
JP1  [SMT-JUMPER_3_NO_NO-SILK]  16.63,14.22 180 bottom
JP2  [SMT-JUMPER_2_NC_TRACE_NO-SILK]  16.63,9.46 0 bottom
JP3  [SMT-JUMPER_3_NO_NO-SILK]  37.46,14.22 180 bottom
JP4  [SMT-JUMPER_2_NC_TRACE_NO-SILK]  37.46,9.46 0 bottom
JP5  [SMT-JUMPER_3_NO_NO-SILK]  58.29,14.22 180 bottom
JP6  [SMT-JUMPER_2_NC_TRACE_NO-SILK]  58.29,9.46 0 bottom
JP7  [SMT-JUMPER_3_NO_NO-SILK]  79.12,14.22 180 bottom
JP8  [SMT-JUMPER_2_NC_TRACE_NO-SILK]  79.12,9.46 0 bottom
JP9  [SMT-JUMPER_3_NO_NO-SILK]  99.95,14.22 180 bottom
JP10  [SMT-JUMPER_2_NC_TRACE_NO-SILK]  99.95,9.46 0 bottom
JP11  [SMT-JUMPER_3_NO_NO-SILK]  120.77,14.22 180 bottom
JP12  [SMT-JUMPER_2_NC_TRACE_NO-SILK]  120.77,9.46 0 bottom
JP13  [SMT-JUMPER_3_NO_NO-SILK]  141.6,14.22 180 bottom
JP14  [SMT-JUMPER_2_NC_TRACE_NO-SILK]  141.6,9.46 0 bottom
JP15  [SMT-JUMPER_3_NO_NO-SILK]  162.43,14.22 180 bottom
JP16  [SMT-JUMPER_2_NC_TRACE_NO-SILK]  162.43,9.46 0 bottom
JP17  [SMT-JUMPER_3_NO_NO-SILK]  183.26,14.22 180 bottom
JP18  [SMT-JUMPER_2_NC_TRACE_NO-SILK]  183.26,9.46 0 bottom
JP19  [SMT-JUMPER_3_NO_NO-SILK]  204.09,14.22 180 bottom
JP20  [SMT-JUMPER_2_NC_TRACE_NO-SILK]  204.09,9.46 0 bottom
JP21  [SMT-JUMPER_3_NO_NO-SILK]  16.63,35.05 180 bottom
JP22  [SMT-JUMPER_2_NC_TRACE_NO-SILK]  16.63,30.29 0 bottom
JP23  [SMT-JUMPER_3_NO_NO-SILK]  37.46,35.05 180 bottom
JP24  [SMT-JUMPER_2_NC_TRACE_NO-SILK]  37.46,30.29 0 bottom
JP25  [SMT-JUMPER_3_NO_NO-SILK]  58.29,35.05 180 bottom
JP26  [SMT-JUMPER_2_NC_TRACE_NO-SILK]  58.29,30.29 0 bottom
JP27  [SMT-JUMPER_3_NO_NO-SILK]  79.12,35.05 180 bottom
JP28  [SMT-JUMPER_2_NC_TRACE_NO-SILK]  79.12,30.29 0 bottom
JP29  [SMT-JUMPER_3_NO_NO-SILK]  99.95,35.05 180 bottom
JP30  [SMT-JUMPER_2_NC_TRACE_NO-SILK]  99.95,30.29 0 bottom
JP31  [SMT-JUMPER_3_NO_NO-SILK]  120.77,35.05 180 bottom
JP32  [SMT-JUMPER_2_NC_TRACE_NO-SILK]  120.77,30.29 0 bottom
JP33  [SMT-JUMPER_3_NO_NO-SILK]  141.6,35.05 180 bottom
JP34  [SMT-JUMPER_2_NC_TRACE_NO-SILK]  141.6,30.29 0 bottom
JP35  [SMT-JUMPER_3_NO_NO-SILK]  162.43,35.05 180 bottom
JP36  [SMT-JUMPER_2_NC_TRACE_NO-SILK]  162.43,30.29 0 bottom
JP37  [SMT-JUMPER_3_NO_NO-SILK]  183.26,35.05 180 bottom
JP38  [SMT-JUMPER_2_NC_TRACE_NO-SILK]  183.26,30.29 0 bottom
JP39  [SMT-JUMPER_3_NO_NO-SILK]  204.09,35.05 180 bottom
JP40  [SMT-JUMPER_2_NC_TRACE_NO-SILK]  204.09,30.29 0 bottom
JP41  [SMT-JUMPER_3_NO_NO-SILK]  16.63,55.88 180 bottom
JP42  [SMT-JUMPER_2_NC_TRACE_NO-SILK]  16.63,51.12 0 bottom
JP43  [SMT-JUMPER_3_NO_NO-SILK]  37.46,55.88 180 bottom
JP44  [SMT-JUMPER_2_NC_TRACE_NO-SILK]  37.46,51.12 0 bottom
JP45  [SMT-JUMPER_3_NO_NO-SILK]  58.29,55.88 180 bottom
JP46  [SMT-JUMPER_2_NC_TRACE_NO-SILK]  58.29,51.12 0 bottom
JP47  [SMT-JUMPER_3_NO_NO-SILK]  79.12,55.88 180 bottom
JP48  [SMT-JUMPER_2_NC_TRACE_NO-SILK]  79.12,51.12 0 bottom
JP49  [SMT-JUMPER_3_NO_NO-SILK]  99.95,55.88 180 bottom
JP50  [SMT-JUMPER_2_NC_TRACE_NO-SILK]  99.95,51.12 0 bottom
JP51  [SMT-JUMPER_3_NO_NO-SILK]  120.77,55.88 180 bottom
JP52  [SMT-JUMPER_2_NC_TRACE_NO-SILK]  120.77,51.12 0 bottom
JP53  [SMT-JUMPER_3_NO_NO-SILK]  141.6,55.88 180 bottom
JP54  [SMT-JUMPER_2_NC_TRACE_NO-SILK]  141.6,51.12 0 bottom
JP55  [SMT-JUMPER_3_NO_NO-SILK]  162.43,55.88 180 bottom
JP56  [SMT-JUMPER_2_NC_TRACE_NO-SILK]  162.43,51.12 0 bottom
JP57  [SMT-JUMPER_3_NO_NO-SILK]  183.26,55.88 180 bottom
JP58  [SMT-JUMPER_2_NC_TRACE_NO-SILK]  183.26,51.12 0 bottom
JP59  [SMT-JUMPER_3_NO_NO-SILK]  204.09,55.88 180 bottom
JP60  [SMT-JUMPER_2_NC_TRACE_NO-SILK]  204.09,51.12 0 bottom
JP61  [SMT-JUMPER_3_NO_NO-SILK]  16.63,76.71 180 bottom
JP62  [SMT-JUMPER_2_NC_TRACE_NO-SILK]  16.63,71.95 0 bottom
JP63  [SMT-JUMPER_3_NO_NO-SILK]  37.46,76.71 180 bottom
JP64  [SMT-JUMPER_2_NC_TRACE_NO-SILK]  37.46,71.95 0 bottom
JP65  [SMT-JUMPER_3_NO_NO-SILK]  58.29,76.71 180 bottom
JP66  [SMT-JUMPER_2_NC_TRACE_NO-SILK]  58.29,71.95 0 bottom
JP67  [SMT-JUMPER_3_NO_NO-SILK]  79.12,76.71 180 bottom
JP68  [SMT-JUMPER_2_NC_TRACE_NO-SILK]  79.12,71.95 0 bottom
JP69  [SMT-JUMPER_3_NO_NO-SILK]  99.95,76.71 180 bottom
JP70  [SMT-JUMPER_2_NC_TRACE_NO-SILK]  99.95,71.95 0 bottom
JP71  [SMT-JUMPER_3_NO_NO-SILK]  120.77,76.71 180 bottom
JP72  [SMT-JUMPER_2_NC_TRACE_NO-SILK]  120.77,71.95 0 bottom
JP73  [SMT-JUMPER_3_NO_NO-SILK]  141.6,76.71 180 bottom
JP74  [SMT-JUMPER_2_NC_TRACE_NO-SILK]  141.6,71.95 0 bottom
JP75  [SMT-JUMPER_3_NO_NO-SILK]  162.43,76.71 180 bottom
JP76  [SMT-JUMPER_2_NC_TRACE_NO-SILK]  162.43,71.95 0 bottom
JP77  [SMT-JUMPER_3_NO_NO-SILK]  183.26,76.71 180 bottom
JP78  [SMT-JUMPER_2_NC_TRACE_NO-SILK]  183.26,71.95 0 bottom
JP79  [SMT-JUMPER_3_NO_NO-SILK]  204.09,76.71 180 bottom
JP80  [SMT-JUMPER_2_NC_TRACE_NO-SILK]  204.09,71.95 0 bottom
JP81  [SMT-JUMPER_3_NO_NO-SILK]  16.63,97.54 180 bottom
JP82  [SMT-JUMPER_2_NC_TRACE_NO-SILK]  16.63,92.77 0 bottom
JP83  [SMT-JUMPER_3_NO_NO-SILK]  37.46,97.54 180 bottom
JP84  [SMT-JUMPER_2_NC_TRACE_NO-SILK]  37.46,92.77 0 bottom
JP85  [SMT-JUMPER_3_NO_NO-SILK]  58.29,97.54 180 bottom
JP86  [SMT-JUMPER_2_NC_TRACE_NO-SILK]  58.29,92.77 0 bottom
JP87  [SMT-JUMPER_3_NO_NO-SILK]  79.12,97.54 180 bottom
JP88  [SMT-JUMPER_2_NC_TRACE_NO-SILK]  79.12,92.77 0 bottom
JP89  [SMT-JUMPER_3_NO_NO-SILK]  99.95,97.54 180 bottom
JP90  [SMT-JUMPER_2_NC_TRACE_NO-SILK]  99.95,92.77 0 bottom
JP91  [SMT-JUMPER_3_NO_NO-SILK]  120.77,97.54 180 bottom
JP92  [SMT-JUMPER_2_NC_TRACE_NO-SILK]  120.77,92.77 0 bottom
JP93  [SMT-JUMPER_3_NO_NO-SILK]  141.6,97.54 180 bottom
JP94  [SMT-JUMPER_2_NC_TRACE_NO-SILK]  141.6,92.77 0 bottom
JP95  [SMT-JUMPER_3_NO_NO-SILK]  162.43,97.54 180 bottom
JP96  [SMT-JUMPER_2_NC_TRACE_NO-SILK]  162.43,92.77 0 bottom
JP97  [SMT-JUMPER_3_NO_NO-SILK]  183.26,97.54 180 bottom
JP98  [SMT-JUMPER_2_NC_TRACE_NO-SILK]  183.26,92.77 0 bottom
JP99  [SMT-JUMPER_3_NO_NO-SILK]  204.09,97.54 180 bottom
JP100  [SMT-JUMPER_2_NC_TRACE_NO-SILK]  204.09,92.77 0 bottom
JP101  [SMT-JUMPER_3_NO_NO-SILK]  16.63,118.36 180 bottom
JP102  [SMT-JUMPER_2_NC_TRACE_NO-SILK]  16.63,113.6 0 bottom
JP103  [SMT-JUMPER_3_NO_NO-SILK]  37.46,118.36 180 bottom
JP104  [SMT-JUMPER_2_NC_TRACE_NO-SILK]  37.46,113.6 0 bottom
JP105  [SMT-JUMPER_3_NO_NO-SILK]  58.29,118.36 180 bottom
JP106  [SMT-JUMPER_2_NC_TRACE_NO-SILK]  58.29,113.6 0 bottom
JP107  [SMT-JUMPER_3_NO_NO-SILK]  79.12,118.36 180 bottom
JP108  [SMT-JUMPER_2_NC_TRACE_NO-SILK]  79.12,113.6 0 bottom
JP109  [SMT-JUMPER_3_NO_NO-SILK]  99.95,118.36 180 bottom
JP110  [SMT-JUMPER_2_NC_TRACE_NO-SILK]  99.95,113.6 0 bottom
JP111  [SMT-JUMPER_3_NO_NO-SILK]  120.77,118.36 180 bottom
JP112  [SMT-JUMPER_2_NC_TRACE_NO-SILK]  120.77,113.6 0 bottom
JP113  [SMT-JUMPER_3_NO_NO-SILK]  141.6,118.36 180 bottom
JP114  [SMT-JUMPER_2_NC_TRACE_NO-SILK]  141.6,113.6 0 bottom
JP115  [SMT-JUMPER_3_NO_NO-SILK]  162.43,118.36 180 bottom
JP116  [SMT-JUMPER_2_NC_TRACE_NO-SILK]  162.43,113.6 0 bottom
JP117  [SMT-JUMPER_3_NO_NO-SILK]  183.26,118.36 180 bottom
JP118  [SMT-JUMPER_2_NC_TRACE_NO-SILK]  183.26,113.6 0 bottom
JP119  [SMT-JUMPER_3_NO_NO-SILK]  204.09,118.36 180 bottom
JP120  [SMT-JUMPER_2_NC_TRACE_NO-SILK]  204.09,113.6 0 bottom
JP121  [SMT-JUMPER_3_NO_NO-SILK]  16.63,139.19 180 bottom
JP122  [SMT-JUMPER_2_NC_TRACE_NO-SILK]  16.63,134.43 0 bottom
JP123  [SMT-JUMPER_3_NO_NO-SILK]  37.46,139.19 180 bottom
JP124  [SMT-JUMPER_2_NC_TRACE_NO-SILK]  37.46,134.43 0 bottom
JP125  [SMT-JUMPER_3_NO_NO-SILK]  58.29,139.19 180 bottom
JP126  [SMT-JUMPER_2_NC_TRACE_NO-SILK]  58.29,134.43 0 bottom
JP127  [SMT-JUMPER_3_NO_NO-SILK]  79.12,139.19 180 bottom
JP128  [SMT-JUMPER_2_NC_TRACE_NO-SILK]  79.12,134.43 0 bottom
JP129  [SMT-JUMPER_3_NO_NO-SILK]  99.95,139.19 180 bottom
JP130  [SMT-JUMPER_2_NC_TRACE_NO-SILK]  99.95,134.43 0 bottom
JP131  [SMT-JUMPER_3_NO_NO-SILK]  120.77,139.19 180 bottom
JP132  [SMT-JUMPER_2_NC_TRACE_NO-SILK]  120.77,134.43 0 bottom
JP133  [SMT-JUMPER_3_NO_NO-SILK]  141.6,139.19 180 bottom